# Altium PCB mainboard.PcbDoc (part 1 of 2)
Units mil, origin at the board's own origin, x right, y up, seen from the top; angles counter-clockwise.
Board outline 2559.06 x 3545 mil, 4 copper layers (SIG1, GND, PWR, SIG2), stack 61.811 mil thick; 133 components, 106 nets, 436 pads, 349 vias.
Unrouted connection lines stored in the file: 120.
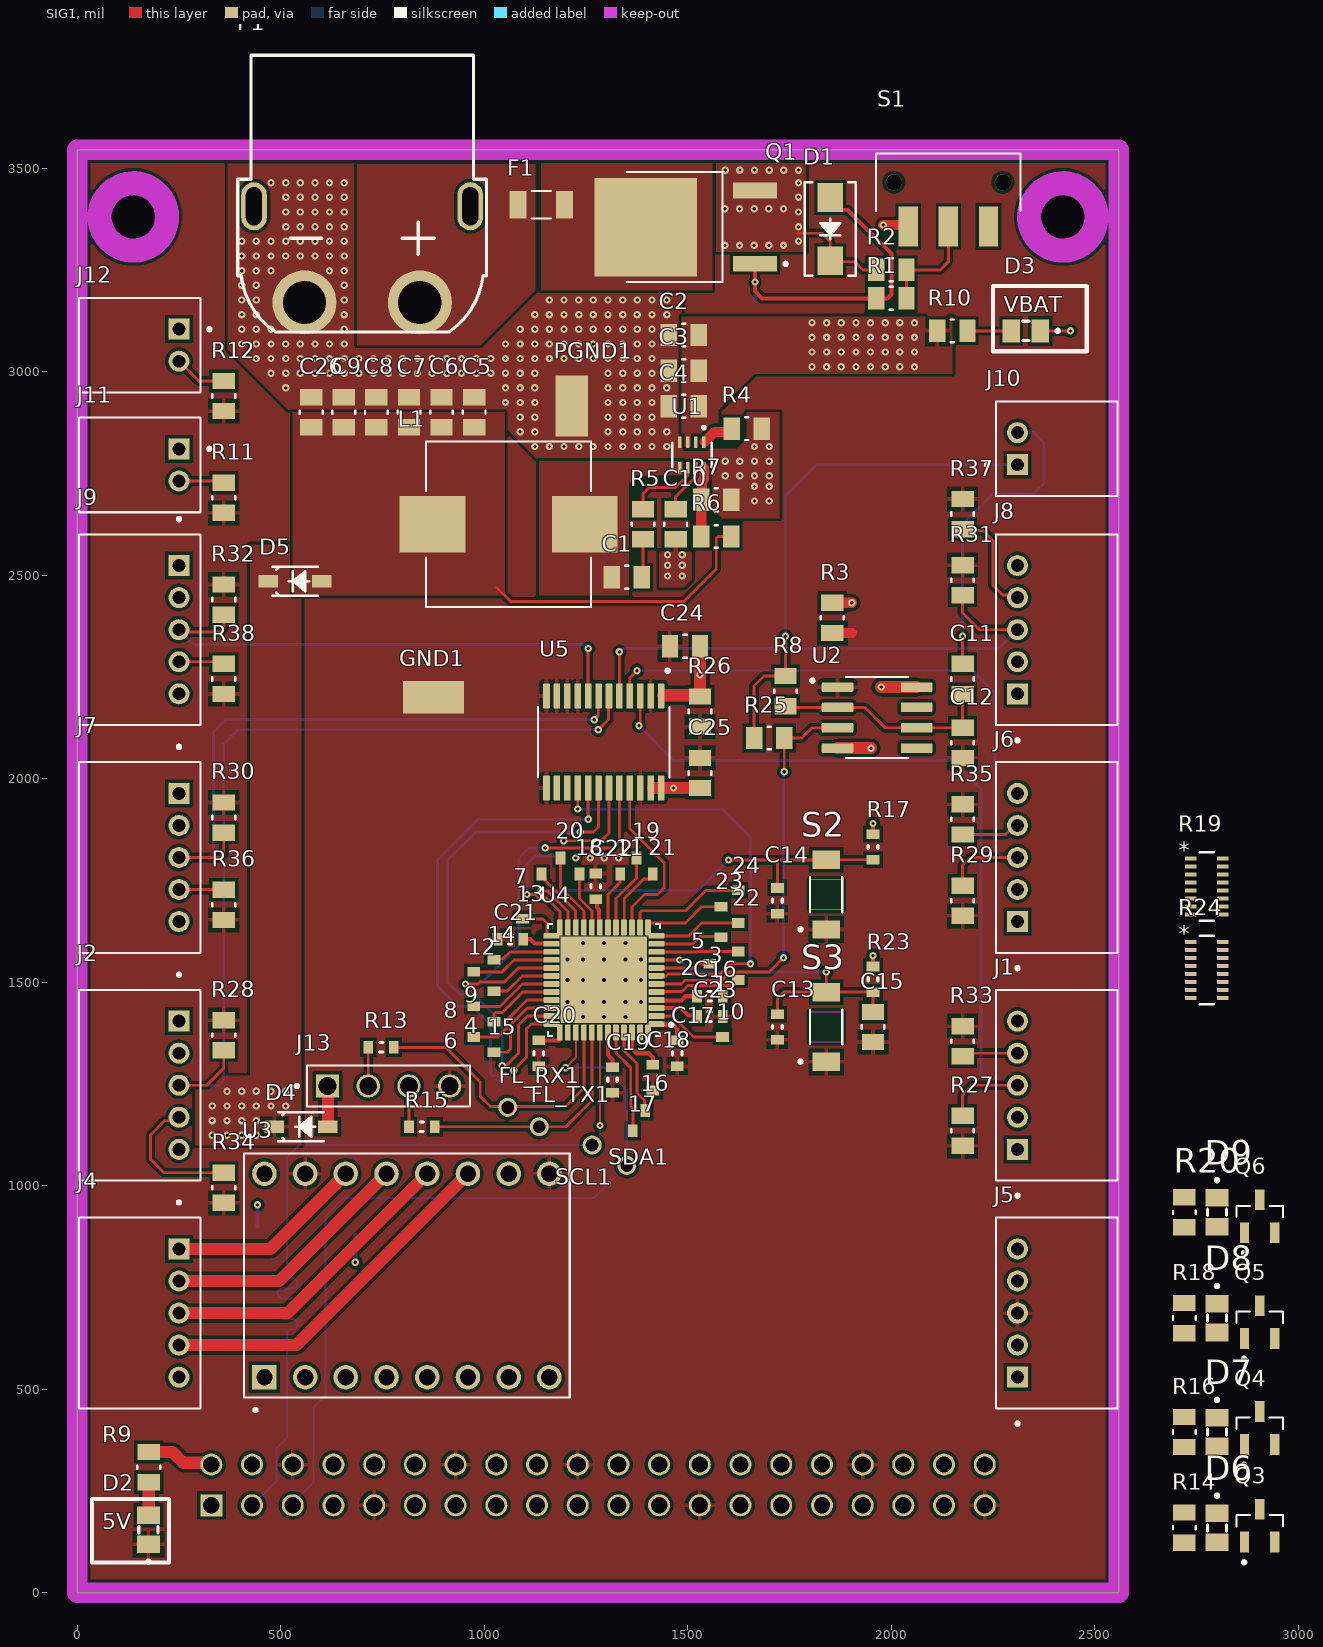
[diagram p0: SIG1 view]
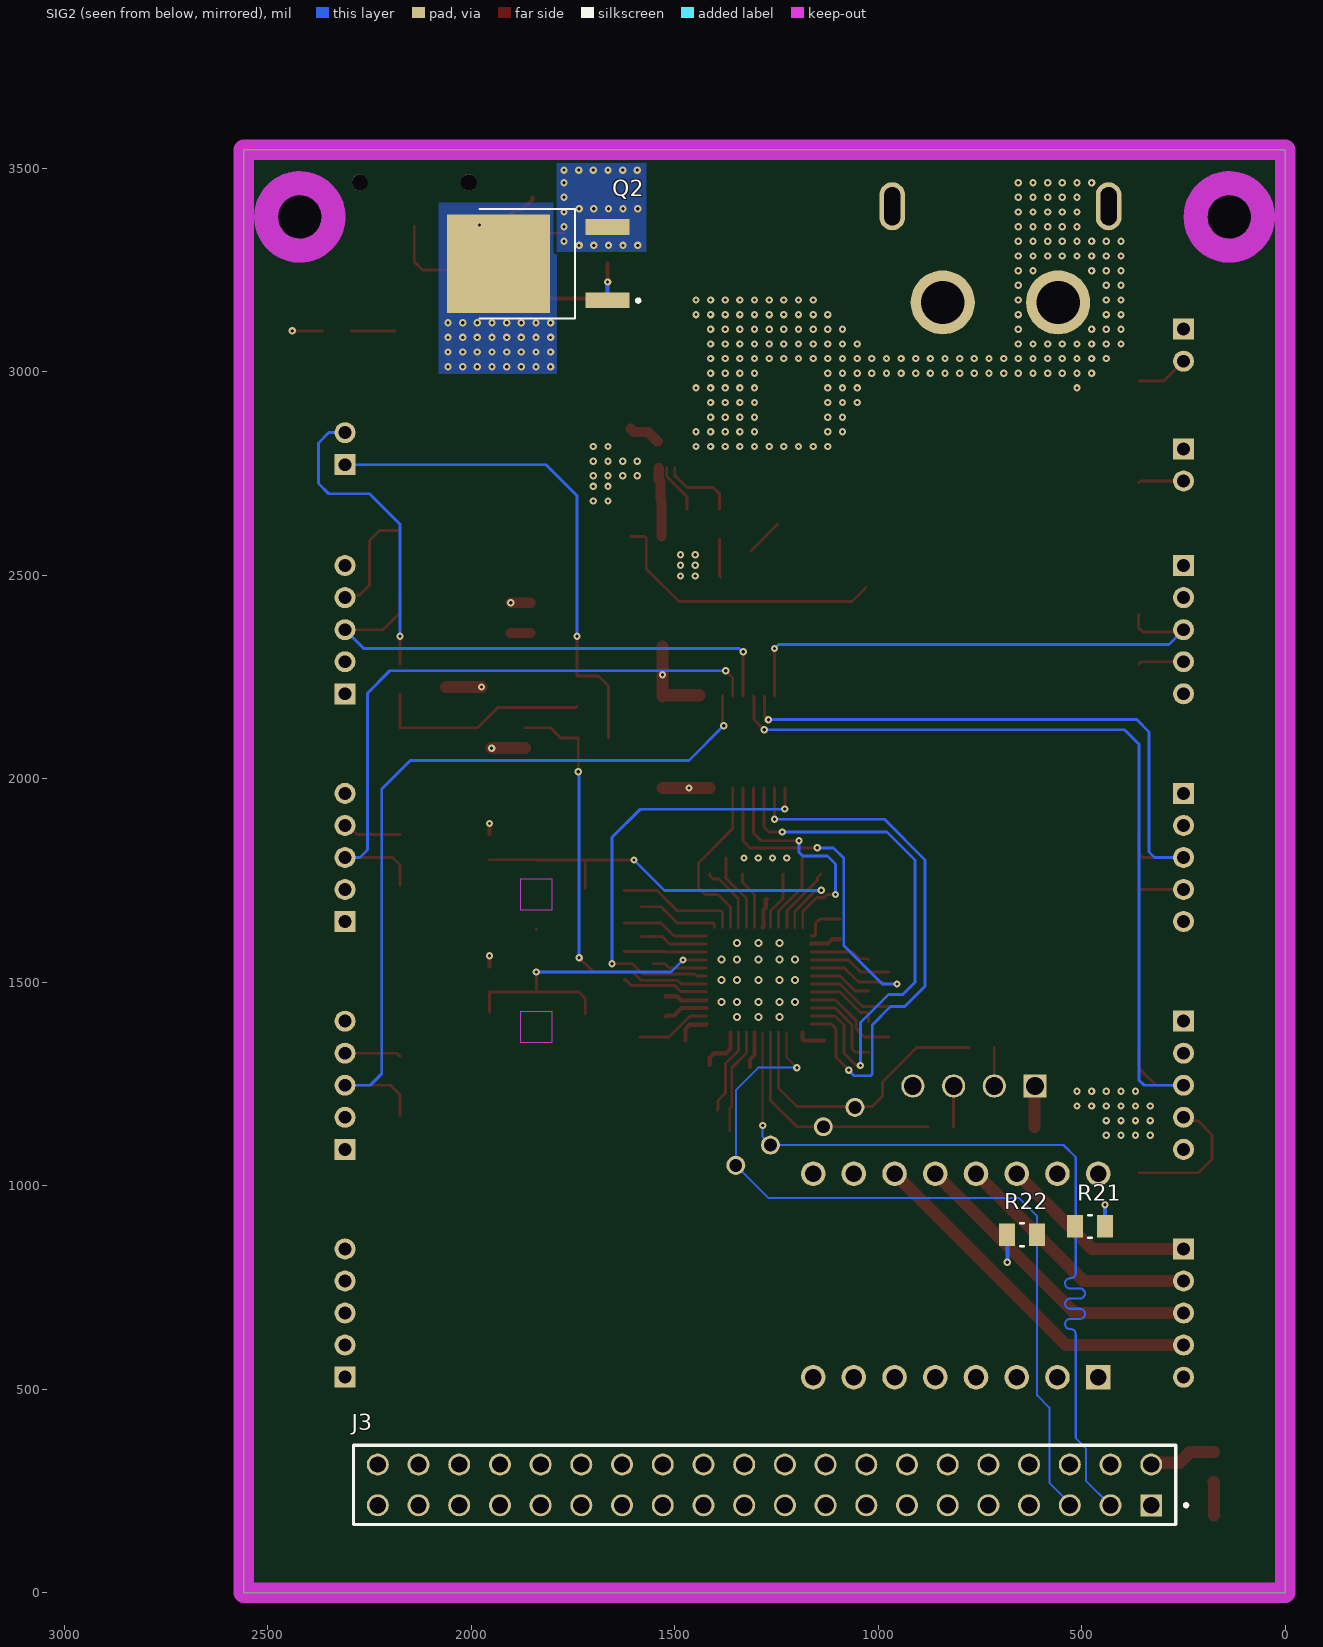
[diagram p1: SIG2 view, seen from below]
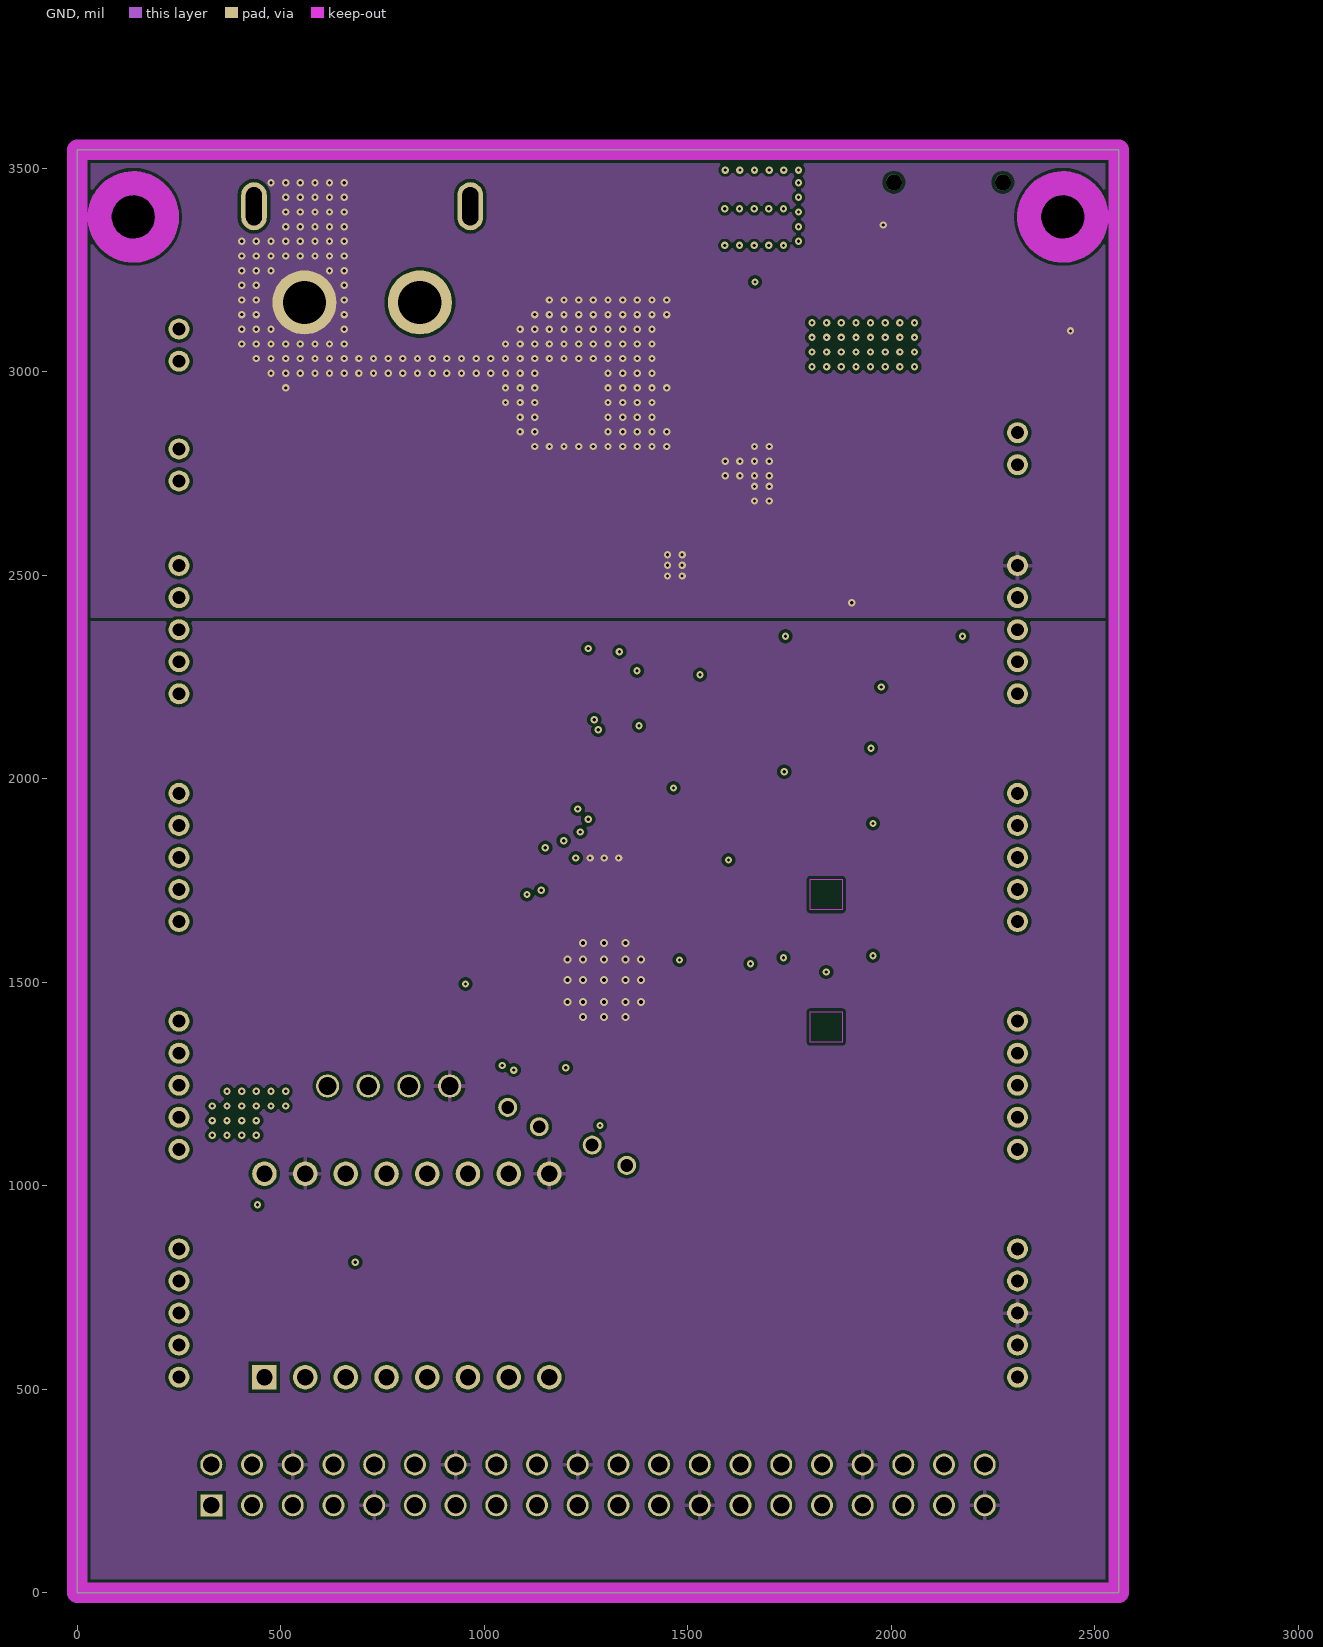
[diagram p2: GND]
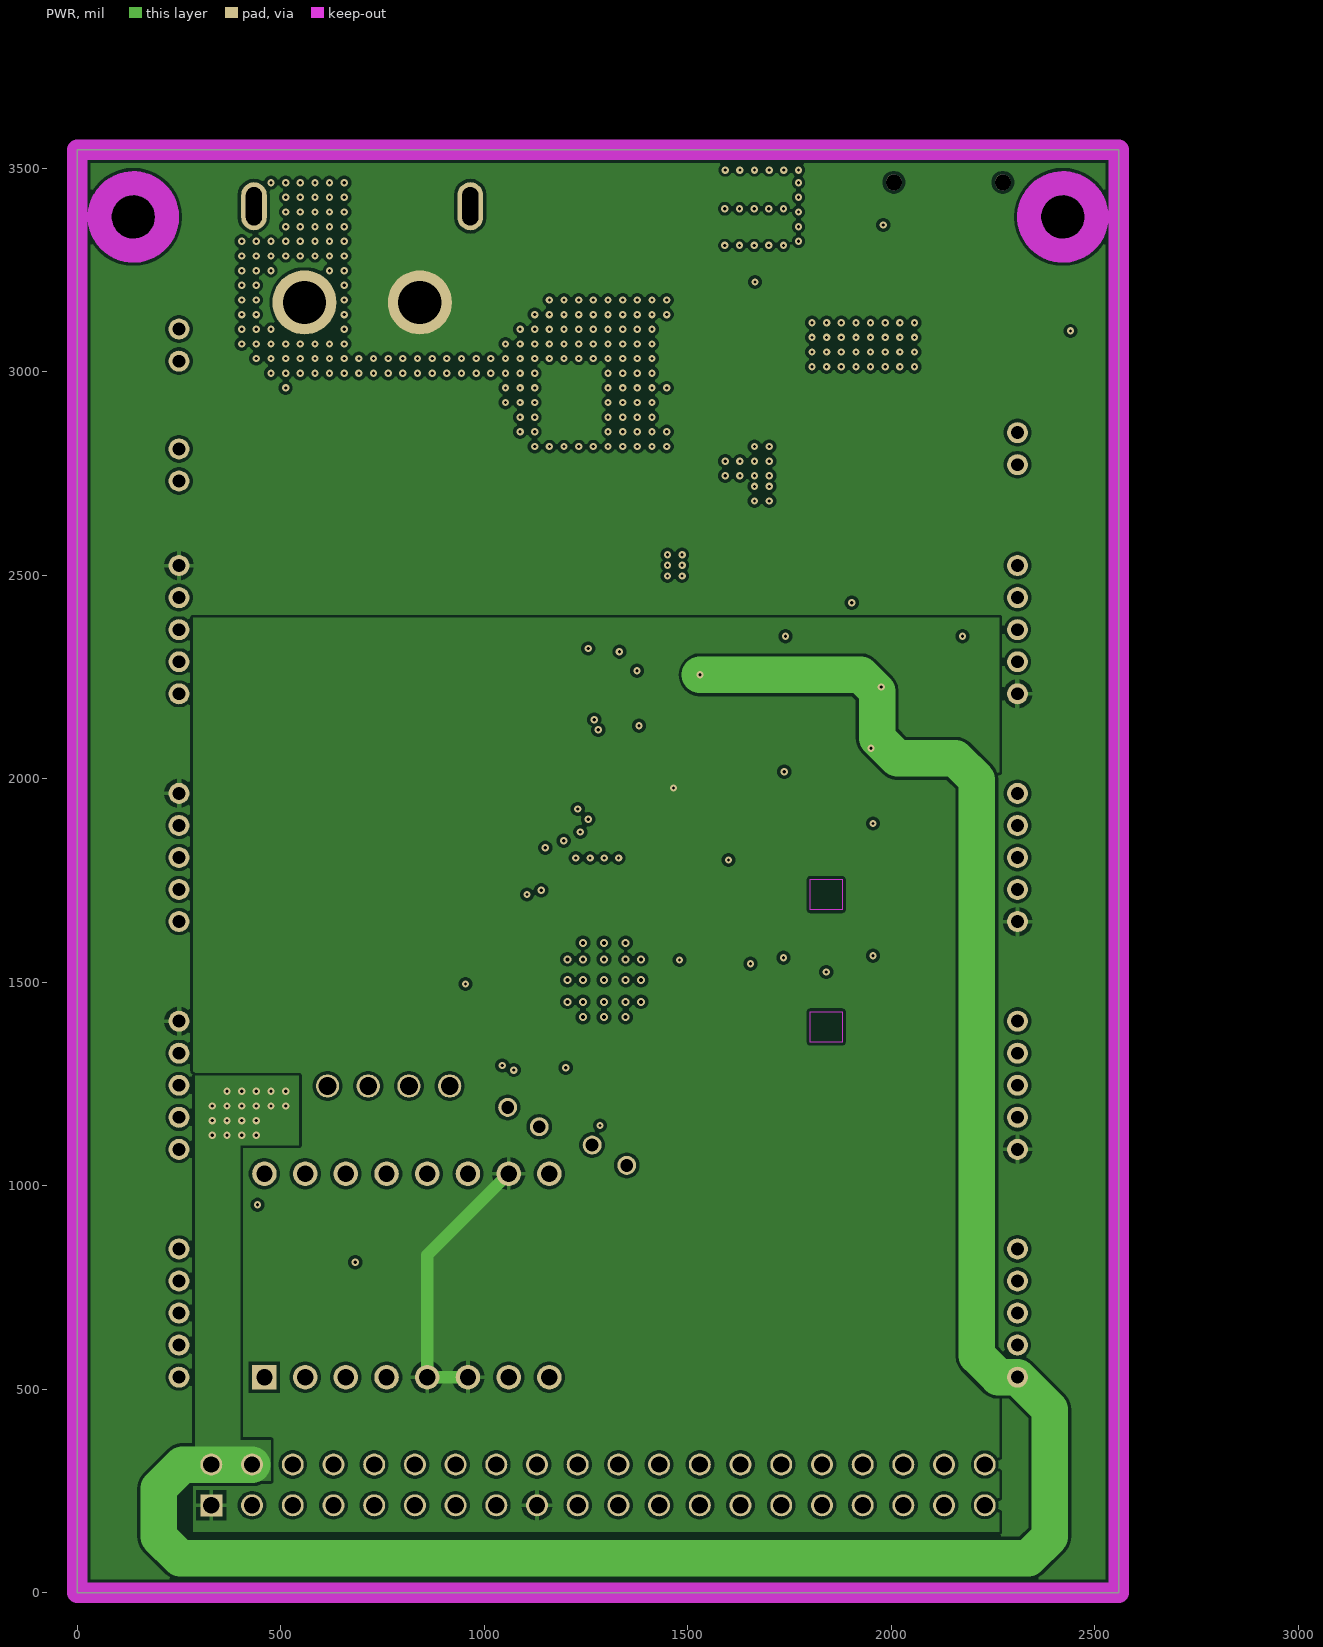
[diagram p3: PWR]

## Layer stack, top to bottom
Top Mask: solder mask 0.5906, Solder Resist, Dk 3.8
SIG1: signal copper 1.378
Dielectric 1: prepreg 3.937, 2313, Dk 4.05
GND: signal copper 0.689
Core: core 49.8031, FR-4, Dk 4.5
PWR: signal copper 0.689
Dielectric 2: prepreg 3.937, 2313, Dk 4.05
SIG2: signal copper 1.378
Bottom Mask: solder mask 0.5906, Solder Resist, Dk 3.8

## Board outline
0,0 0,3545 2559.05,3545 2559.06,0

## Design rules (kind name [scope] priority, off if disabled: settings)
BoardOutlineClearance [All] p1: gap=7.87 ignorepadtopadclearanceinfootprint=FALSE except(15.75: Arc-SplitBarrior Arc-SplitContinuation Track-SplitBarrior Track-SplitContinuation SMDPad-SplitBarrior SMDPad-SplitContinuation THPad-SplitBarrior THPad-SplitContinuation Via-SplitBarrior Via-SplitContinuation Fill-SplitBarrior Fill-SplitContinuation Poly-SplitBarrior Poly-SplitContinuation Region-SplitBarrior Region-SplitContinuation Text-SplitBarrior Text-SplitContinuation)
Clearance "Clearance Bottom Layer" [OnLayer('Bottom Layer')] p1: gap=8 ignorepadtopadclearanceinfootprint=TRUE except(10: Arc-Text Track-Text SMDPad-Text THPad-Text Via-Text Fill-Text Poly-Text Region-Text Text-Text)
Clearance "Clearance Top Layer" [OnLayer('Top Layer')] p2: gap=8 ignorepadtopadclearanceinfootprint=TRUE except(10: Arc-Text Track-Text SMDPad-Text THPad-Text Via-Text Fill-Text Poly-Text Region-Text Text-Text)
Clearance [All] p3: gap=7.87 ignorepadtopadclearanceinfootprint=FALSE except(3.5: Arc-Arc Arc-Track Arc-SMDPad Track-Track Track-SMDPad SMDPad-SMDPad; 5: Arc-Via Track-Via SMDPad-Via THPad-Via Via-Via; 10: Arc-Text Track-Text SMDPad-Text THPad-Text Via-Text Fill-Text Poly-Text Region-Text Text-Text)
HoleSize [All] p1: absolutevalues=TRUE maxlimit=248.03 minlimit=7.87 maxpercent=80.000 minpercent=20.000
MinimumAnnularRing [All] p1: minimumring=3
MinimumSolderMaskSliver [All] p1: minsoldermaskwidth=3.94
PolygonConnect PolygonConnect_Vias [IsVia] p1: connectstyle=Direct reliefconductorwidth=10 reliefentries=4 polygonreliefangle="90 Angle" airgapwidth=10
PolygonConnect [All] p2: connectstyle=Relief reliefconductorwidth=10 reliefentries=4 polygonreliefangle="90 Angle" airgapwidth=10
RoomDefinition "ESP32 Microcontroller" [InComponentClass('ESP32 Microcontroller')] p1: confinementstyle=ConfineIn formatcopy=TRUE lockcomponents=FALSE outline -1000,-950 955,-950 955,-318.5 -1000,-318.5
RoomDefinition "Raspberry Pi, BLDC, Stepper, and Coil Connectors" [InComponentClass('Raspberry Pi, BLDC, Stepper, and Coil Connectors')] p2: confinementstyle=ConfineIn formatcopy=TRUE lockcomponents=FALSE outline -1000,-1000 1000,-1000 1000,0 -1000,0
RoomDefinition "Power Input & Regulation" [InComponentClass('Power Input & Regulation')] p3: confinementstyle=ConfineIn formatcopy=TRUE lockcomponents=FALSE outline -1000,-1000 1000,-1000 1000,0 -1000,0
RoomDefinition "555 Metal Detector Circuit" [InComponentClass('555 Metal Detector Circuit')] p4: confinementstyle=ConfineIn formatcopy=TRUE lockcomponents=FALSE outline -1000,-1000 1000,-1000 1000,0 -1000,0
RoutingCorners [All] p1: cornerstyle=Round minsetback=100 maxsetback=100
RoutingVias [All] p1: holewidth=19.68 width=39.37 viastyle="Through Hole" minholewidth=7.87 minwidth=17.72 maxholewidth=39.37 maxwidth=78.74
SilkToSilkClearance [All] p1: silktosilkclearance=3.94
SilkToSolderMaskClearance [IsPad] p1: minsilkscreentomaskgap=3.94 clearancetoexposedcopper=TRUE
SolderMaskExpansion SolderMaskExpansion_Via [IsVia] p1: expansion=4 istentingtop=TRUE
SolderMaskExpansion [All] p2: expansion=4 istentingtop=FALSE
Width [All] p1: maxlimit=100 minlimit=3.5 preferedwidth=7
25 further rules are at their usual default settings.

## Classes and differential pairs
component class "ESP32 Microcontroller": 1 2 3 4 5 6 7 8 9 10 11 12 13 14 15 16 17 18 19 20 21 22 23 24 BOOT1 C13 C14 C15 C16 C17 C18 C19 C20 C21 C22 C23 FL_RX1 FL_TX1 J13 R13 R15 R17 R21 R22 R23 RESET1 S2 S3 SCL1 SDA1 U4
component class "Raspberry Pi, BLDC, Stepper, and Coil Connectors": C24 C25 D6 D7 D8 D9 J1 J2 J3 J4 J5 J6 J7 J8 J9 J10 J11 J12 Q3 Q4 Q5 Q6 R11 R12 R14 R16 R18 R19 R20 R24 R26 R27 R28 R29 R30 R31 R32 R33 R34 R35 R36 R37 R38 U3 U5
component class "555 Metal Detector Circuit": C11 C12 R8 R25 U2
component class "Power Input & Regulation": C1 C2 C3 C4 C5 C6 C7 C8 C9 C10 C26 D1 D2 D3 D4 D5 F1 GND1 L1 P1 PGND1 Q1 Q2 R1 R2 R3 R4 R5 R6 R7 R9 R10 S1 U1

## Components (designator, comment, footprint, x,y, rotation, side; value= is the part's Value field where it differs from the comment)
1 "Breakout Pin 0603" "BreakoutPin 0603" 1624.01,1505.47 r90 top
2 "Breakout Pin 0603" "BreakoutPin 0603" 1554.01,1545.47 r90 top
3 "Breakout Pin 0603" "BreakoutPin 0603" 1624.01,1575.47 r270 top
4 "Breakout Pin 0603" "BreakoutPin 0603" 1024.01,1402.97 r270 top
5 "Breakout Pin 0603" "BreakoutPin 0603" 1581.57,1610.47 r90 top
6 "Breakout Pin 0603" "BreakoutPin 0603" 974.01,1365.47 r90 top
7 "Breakout Pin 0603" "BreakoutPin 0603" 1140.67,1765.47 r0 top
8 "Breakout Pin 0603" "BreakoutPin 0603" 974.01,1440.47 r90 top
9 "Breakout Pin 0603" "BreakoutPin 0603" 1024.01,1477.97 r90 top
10 "Breakout Pin 0603" "BreakoutPin 0603" 1585.5,1365.47 r270 top
11 "Breakout Pin 0603" "BreakoutPin 0603" 1334.01,1765.47 r0 top
12 "Breakout Pin 0603" "BreakoutPin 0603" 974.01,1525.47 r270 top
13 "Breakout Pin 0603" "BreakoutPin 0603" 1094.01,1655.47 r270 top
14 "Breakout Pin 0603" "BreakoutPin 0603" 1024.01,1555.47 r270 top
15 "Breakout Pin 0603" "BreakoutPin 0603" 1024.01,1327.97 r270 top
16 "Breakout Pin 0603" "BreakoutPin 0603" 1395,1185 r180 top
17 "Breakout Pin 0603" "BreakoutPin 0603" 1365,1135 r180 top
18 "Breakout Pin 0603" "BreakoutPin 0603" 1234.01,1765.47 r0 top
19 "Breakout Pin 0603" "BreakoutPin 0603" 1374.01,1805.47 r0 top
20 "Breakout Pin 0603" "BreakoutPin 0603" 1187.34,1805.47 r0 top
21 "Breakout Pin 0603" "BreakoutPin 0603" 1414.01,1765.47 r180 top
22 "Breakout Pin 0603" "BreakoutPin 0603" 1624.01,1645.47 r90 top
23 "Breakout Pin 0603" "BreakoutPin 0603" 1581.57,1685.47 r270 top
24 "Breakout Pin 0603" "BreakoutPin 0603" 1624.01,1725.47 r270 top
C1 "0.1uF 50V" 0805 1350,2495 r0 top value=10uF
C2 "10uF 50V" 0805 1490,3090 r0 top value=10uF
C3 "10uF 50V" 0805 1490,3002.5 r0 top value=10uF
C4 "0.1uF 50V" 0805 1490,2915 r0 top value=10uF
C5 "22uF" 0805 975,2900 r270 top
C6 "22uF" 0805 895,2900 r270 top
C7 "22uF" 0805 815,2900 r270 top
C8 "0.1uF 50V" 0805 735,2900 r270 top value=10uF
C9 "0.1uF 50V" 0805 655,2900 r270 top value=10uF
C10 "33nF 50V" 0805 1470,2625 r90 top value=33nF
C11 "2.2uF" 0805 2175,2245 r90 top
C12 "2.2uF" 0805 2175,2088 r90 top
C13 "0.10uF" 0603 1720,1390 r90 top
C14 "0.10uF" 0603 1720,1700 r90 top
C15 "0.10uF" 0805 1955,1390 r90 top
C16 "4.7uF" 0603 1554.01,1465.47 r180 top
C17 "1.0uF" 0603 1474.01,1325.47 r90 top
C18 "1.0uF" 0603 1414.01,1265.47 r90 top
C19 "1.0uF" 0603 1315,1260 r90 top
C20 "1.0uF" 0603 1134.01,1325.47 r90 top
C21 "1.0uF" 0603 1064.01,1605.47 r0 top
C22 "1.0uF" 0603 1274.01,1735.47 r270 top
C23 "1.0uF" 0603 1554.01,1415.47 r180 top
C24 "0.10uF" 0805 1493,2325 r0 top
C25 "0.10uF" 0805 1530,2014.01 r270 top
C26 "22uF" 0805 575,2900 r270 top
D1 "SMAZ12-13-F" SMA_DIO-L 1850,3350 r90 top
D2 "SML-LXT0805IW-TR" LEDC2012X120N 175,155 r90 top
D3 "SML-LXT0805GW-TR" LEDC2012X120N 2330,3100 r180 top
D4 "SM5817PL-TP" SOD-123 550,1145 r0 top
D5 "SM5817PL-TP" SOD-123 535,2485 r0 top
D6 "SML-LXT0805IW-TR" LEDC2012X120N 2800,160 r270 top
D7 "SML-LXT0805IW-TR" LEDC2012X120N 2800,395 r270 top
D8 "SML-LXT0805IW-TR" LEDC2012X120N 2800,675 r270 top
D9 "SML-LXT0805IW-TR" LEDC2012X120N 2800,935 r270 top
F1 "Fuse 10A 1206" 1206 1140,3410 r0 top
FL_RX1 "Test Point (Via)" TP 1057.5,1192.5 r180 top
FL_TX1 "Test Point (Via)" TP 1135,1145 r180 top
GND1 "Test Point - 5019" TP380X203 875,2200 r180 top
J1 "S5B-PH-K-S(LF)(SN)" JST_S5B-PH-K-S(LF)(SN) 2310,1246.8 r90 top
J2 "S5B-PH-K-S(LF)(SN)" JST_S5B-PH-K-S(LF)(SN) 250,1246.8 r270 top
J3 "CN HDR 40POS" "CN HDR 40POS 0.1 TH" 1279.53,265 r180 bottom
J4 "S5B-PH-K-S(LF)(SN)" JST_S5B-PH-K-S(LF)(SN) 250,687.22 r270 top
J5 "S5B-PH-K-S(LF)(SN)" JST_S5B-PH-K-S(LF)(SN) 2310,687.22 r90 top
J6 "S5B-PH-K-S(LF)(SN)" JST_S5B-PH-K-S(LF)(SN) 2310,1806.38 r90 top
J7 "S5B-PH-K-S(LF)(SN)" JST_S5B-PH-K-S(LF)(SN) 250,1806.38 r270 top
J8 "S5B-PH-K-S(LF)(SN)" JST_S5B-PH-K-S(LF)(SN) 2310,2365.96 r90 top
J9 "S5B-PH-K-S(LF)(SN)" JST_S5B-PH-K-S(LF)(SN) 250,2365.96 r270 top
J10 "S2B-PH-K-S(LF)(SN)" JST_S2B-PH-K-S(LF)(SN) 2310,2810.63 r90 top
J11 "S2B-PH-K-S(LF)(SN)" JST_S2B-PH-K-S(LF)(SN) 250,2770.63 r270 top
J12 "S2B-PH-K-S(LF)(SN)" JST_S2B-PH-K-S(LF)(SN) 250,3065 r270 top
J13 "61300411121" WURTH_61300411121 765,1245 r0 top
L1 "PA4342.682NLT" IND_PA4342.332NLT 1060,2625 r180 top
P1 "XT60" Amass_XT60PW-M 700,3170 r0 top value=N/A
PGND1 "Test Point - 5019" TP380X203 1215,2915 r90 top
Q1 "IPD85P04P4-07" "DPAK (TO-252)" 1500,3355 r90 top
Q2 "IPD85P04P4-07" "DPAK (TO-252)" 1830,3265 r90 bottom
Q3 "T2N7002BK,LM" SOT95P237X112-3N 2905,165 r90 top
Q4 "T2N7002BK,LM" SOT95P237X112-3N 2905,405 r90 top
Q5 "T2N7002BK,LM" SOT95P237X112-3N 2905,665 r90 top
Q6 "T2N7002BK,LM" SOT95P237X112-3N 2905,925 r90 top
R1 "100k" 0805 2000,3180 r180 top
R2 "100k" 0805 2000,3250 r180 top
R3 "0" 0805 1855,2395 r270 top
R4 "0" 0805 1645,2860 r0 top
R5 "0" 0805 1390,2625 r90 top
R6 "53.6k" 0805 1570,2595 r0 top value=1
R7 "10.2k" 0805 1570,2685 r180 top
R8 "47k" 0805 1740,2215 r270 top
R9 "150" 0805 176.04,308.78 r90 top value=1
R10 "1k" 0805 2150,3100 r180 top value=1
R11 "10k" 0805 360,2690 r90 top
R12 "10k" 0805 360,2940 r90 top
R13 "1k" 0603 746.5,1340 r0 top
R14 "150" 0805 2720,160 r270 top
R15 "1k" 0603 846.5,1145 r0 top
R16 "150" 0805 2720,394.91 r270 top
R17 "10k" 0603 1955,1832.13 r90 top
R18 "150" 0805 2720,674.91 r270 top
R19 "YC248-JR-070RL" RES_YC248_4X1P6_YAG-M 2775,1735 r0 top
R20 "150" 0805 2720,934.91 r270 top
R21 "4.7k" 0805 480,900 r180 bottom
R22 "4.7k" 0805 647,879.74 r0 bottom
R23 "10k" 0603 1955,1507.13 r90 top
R24 "YC248-JR-070RL" RES_YC248_4X1P6_YAG-M 2775,1530 r0 top
R25 "0" 0805 1700,2100 r180 top
R26 "10k" 0805 1530,2165 r270 top
R27 "10k" 0805 2175,1135 r270 top
R28 "10k" 0805 360,1369.76 r90 top
R29 "10k" 0805 2175,1700 r270 top
R30 "10k" 0805 360,1904.46 r90 top
R31 "10k" 0805 2175,2487.5 r90 top
R32 "10k" 0805 360,2440 r90 top
R33 "10k" 0805 2175,1355 r90 top
R34 "10k" 0805 360,995 r270 top
R35 "10k" 0805 2175,1900 r90 top
R36 "10k" 0805 360,1690 r270 top
R37 "10k" 0805 2175,2650 r90 top
R38 "10k" 0805 360,2245 r270 top
S1 "SW SLIDE SMALL" "SW SLIDE SMALL" 2140,3465 r180 top locked
S2 "GT-TC029B-H025-L1N" SW_EVP-AWCD4A 1840,1715 r90 top
S3 "GT-TC029B-H025-L1N" SW_EVP-AWCD4A 1840,1390 r90 top
SCL1 "I2C_SCL" TP 1350,1050 r90 top
SDA1 "I2C_SDA" TP 1265,1100 r90 top
U1 "TPS62933DRLR" SOT5X3-8_DRL_TEX 1510,2795 r270 top
U2 "NE555DR" SOIC127P599X175-8N 1965,2150 r0 top
U3 "A4988_STEPPER_MOTOR_DRIVER_CARRIER" MODULE_A4988_STEPPER_MOTOR_DRIVER_CARRIER 810,779.74 r90 top
U4 "ESP32-PICO-D4" "PQFN50P700X700X104-49N - BigPads" 1294.01,1505.47 r180 top
U5 "SN74LVC4245APWR" SOP65P640X120-24N 1293.58,2090 r270 top

## Footprints (in the part's own frame and the unit in brackets; to place one, negate y for a bottom-side part, rotate by r counter-clockwise, add the part's x,y. Pads: shape width x height; smd on the part's side, far side on the other; paste and mask are expansions set on the pad)
0603 [mm] "Chip Resistor, 2-Leads, Body 1.60x0.80mm, IPC High Density"
  rect 0.6x0.8 smd mask+0.1: 1(-0.8,0) 2(0.8,0)
  silkscreen extent -0.1,-0.3 0.1,0.3, body extent -0.8,-0.4 0.8,0.4, height 0.6
0805 [mil]
  rect 40x55 smd: 1(-37,0) 2(37,0)
  silkscreen extent -4,-28 4,28, body extent -47,-28 47,28, height 24
1206 [mm]
  rect 1.05x1.72 smd: 1(-1.46,0) 2(1.46,0)
  silkscreen extent -0.62,-0.85 0.62,0.85, body extent -1.6,-0.8 1.6,0.8, height 1.61
Amass_XT60PW-M [mm] "Right angle XT60 Male Socket"
  round 4 hole 2.7: 1(-3.6,0) 2(3.6,0)
  rrect100% 1.6x3 hole 1 slot 2.4 at 90 deg: Un1(6.75,6) Un2(-6.75,6)
  silkscreen extent -7.76,-1.85 7.76,15.42, body extent -7.95,-1.95 7.95,16.3, height 8.4
"BreakoutPin 0603" [mm] "Exposed 0603 pad for IC breakouts"
  rect 0.6x0.8 smd mask+0.1: 1(0,0)
"CN HDR 40POS 0.1 TH" [mm] "40 Position Header Connector 0.100\" (2.54mm) Through Hole"
  rect 1.37x1.37 hole 1.02: 01(24.13,-1.27)
  round 1.37 hole 1.02: 02(24.13,1.27) 03(21.59,-1.27) 04(21.59,1.27) 05(19.05,-1.27) 06(19.05,1.27) 07(16.51,-1.27) 08(16.51,1.27) 09(13.97,-1.27) 10(13.97,1.27) 11(11.43,-1.27) 12(11.43,1.27) 13(8.89,-1.27) 14(8.89,1.27) 15(6.35,-1.27) 16(6.35,1.27) 17(3.81,-1.27) 18(3.81,1.27) 19(1.27,-1.27) 20(1.27,1.27) 21(-1.27,-1.27) 22(-1.27,1.27) 23(-3.81,-1.27) 24(-3.81,1.27) 25(-6.35,-1.27) 26(-6.35,1.27) 27(-8.89,-1.27) 28(-8.89,1.27) 29(-11.43,-1.27) 30(-11.43,1.27) 31(-13.97,-1.27) 32(-13.97,1.27) 33(-16.51,-1.27) 34(-16.51,1.27) 35(-19.05,-1.27) 36(-19.05,1.27) 37(-21.59,-1.27) 38(-21.59,1.27) 39(-24.13,-1.27) 40(-24.13,1.27)
  silkscreen extent -25.66,-2.47 26.4,2.47, body extent -25.65,-2.54 25.65,2.54, height 8.51
"DPAK (TO-252)" [mil]
  rect 38.58x107.87 smd: 1(-90,-165) 3(90,-165)
  rect 241.67x251.97 smd paste-157.48: 2(0,103)
  silkscreen extent -135,-244 135,150, body extent -128,-185 128,205, height 97
IND_PA4342.332NLT [mm]
  rect 4.1x3.5 smd mask+0.05: 1(-4.75,0) 2(4.75,0)
  silkscreen extent -5.15,-5.15 5.15,5.15, body extent -5.75,-5.15 5.75,5.15, height 4
JST_S2B-PH-K-S(LF)(SN) [mm]
  rect 1.308x1.308 / inner round 1.308 / far side rect 1.308x1.308 hole 0.8: 1(-1,0)
  round 1.308 hole 0.8: 2(1,0)
  silkscreen extent -2.95,-6.25 2.95,2, body extent -2.95,-6.2 2.95,1.4, height 4.8
JST_S5B-PH-K-S(LF)(SN) [mm]
  rect 1.308x1.308 / inner round 1.308 / far side rect 1.308x1.308 hole 0.8: 1(-4,0)
  round 1.308 hole 0.8: 2(-2,0) 3(0,0) 4(2,0) 5(4,0)
  silkscreen extent -7,-6.25 5.95,1.35, body extent -5.95,-6.22 5.95,1.38, height 4.8
LEDC2012X120N [mm]
  rect 1.1x1.45 smd: A(0.9,0) C(-0.9,0)
  silkscreen extent -2.1,-0.6 0.2,0.6, body extent -1,-0.65 1,0.65, height 0.9
MODULE_A4988_STEPPER_MOTOR_DRIVER_CARRIER [mm]
  rect 1.53x1.53 hole 1.02: 1(-6.35,8.89)
  round 1.53 hole 1.02: 2(-6.35,6.35) 3(-6.35,3.81) 4(-6.35,1.27) 5(-6.35,-1.27) 6(-6.35,-3.81) 7(-6.35,-6.35) 8(-6.35,-8.89) 9(6.35,-8.89) 10(6.35,-6.35) 11(6.35,-3.81) 12(6.35,-1.27) 13(6.35,1.27) 14(6.35,3.81) 15(6.35,6.35) 16(6.35,8.89)
  silkscreen extent -8.5,-10.16 7.62,10.16
"PQFN50P700X700X104-49N - BigPads" [mm]
  rrect25% 1x0.35 smd: 1(-3.265,2.75) 2(-3.265,2.25) 3(-3.265,1.75) 4(-3.265,1.25) 5(-3.265,0.75) 6(-3.265,0.25) 7(-3.265,-0.25) 8(-3.265,-0.75) 9(-3.265,-1.25) 10(-3.265,-1.75) 11(-3.265,-2.25) 12(-3.265,-2.75) 25(3.265,-2.75) 26(3.265,-2.25) 27(3.265,-1.75) 28(3.265,-1.25) 29(3.265,-0.75) 30(3.265,-0.25) 31(3.265,0.25) 32(3.265,0.75) 33(3.265,1.25) 34(3.265,1.75) 35(3.265,2.25) 36(3.265,2.75)
  rrect25% 0.35x1 smd: 13(-2.75,-3.265) 14(-2.25,-3.265) 15(-1.75,-3.265) 16(-1.25,-3.265) 17(-0.75,-3.265) 18(-0.25,-3.265) 19(0.25,-3.265) 20(0.75,-3.265) 21(1.25,-3.265) 22(1.75,-3.265) 23(2.25,-3.265) 24(2.75,-3.265) 37(2.75,3.265) 38(2.25,3.265) 39(1.75,3.265) 40(1.25,3.265) 41(0.75,3.265) 42(0.25,3.265) 43(-0.25,3.265) 44(-0.75,3.265) 45(-1.25,3.265) 46(-1.75,3.265) 47(-2.25,3.265) 48(-2.75,3.265)
  rect 5.4x5.4 smd paste-4: 49(0,0)
  silkscreen extent -4.3,-3.5 3.5,3.5, body extent -3.5,-3.5 3.5,3.5, height 1.04
RES_YC248_4X1P6_YAG-M [mil]
  rect 28x10 smd paste+0 mask+0: 1(-39.5,68.9) 2(-39.5,49.21) 3(-39.5,29.53) 4(-39.5,9.84) 5(-39.5,-9.84) 6(-39.5,-29.53) 7(-39.5,-49.21) 8(-39.5,-68.9) 9(39.5,-68.9) 10(39.5,-49.21) 11(39.5,-29.53) 12(39.5,-9.84) 13(39.5,9.84) 14(39.5,29.53) 15(39.5,49.21) 16(39.5,68.9)
  silkscreen extent -17,-84 17,84, body extent -31,-79 31,79, height 22
SMA_DIO-L [mil]
  rect 70.84x62.17 smd paste+0 mask+0: 1(-77.62,0) 2(77.62,0)
  silkscreen extent -115,-62 115,62, body extent -110,-57 110,57, height 93
SOD-123 [mil]
  rect 48x30 smd: A(66,0) C(-66,0)
  silkscreen extent -56,-36 56,36
SOIC127P599X175-8N [mm]
  rrect25% 1.97x0.6 smd: 1(-2.47,1.905) 2(-2.47,0.635) 3(-2.47,-0.635) 4(-2.47,-1.905) 5(2.47,-1.905) 6(2.47,-0.635) 7(2.47,0.635) 8(2.47,1.905)
  silkscreen extent -4.14,-2.52 1.95,2.52
SOP65P640X120-24N [mm]
  rrect25% 1.57x0.41 smd: 1(-2.87,3.575) 2(-2.87,2.925) 3(-2.87,2.275) 4(-2.87,1.625) 5(-2.87,0.975) 6(-2.87,0.325) 7(-2.87,-0.325) 8(-2.87,-0.975) 9(-2.87,-1.625) 10(-2.87,-2.275) 11(-2.87,-2.925) 12(-2.87,-3.575) 13(2.87,-3.575) 14(2.87,-2.925) 15(2.87,-2.275) 16(2.87,-1.625) 17(2.87,-0.975) 18(2.87,-0.325) 19(2.87,0.325) 20(2.87,0.975) 21(2.87,1.625) 22(2.87,2.275) 23(2.87,2.925) 24(2.87,3.575)
  silkscreen extent -4.54,-4.1 2.2,4.1, body extent -3.2,-3.9 3.2,3.9, height 1.2
SOT5X3-8_DRL_TEX [mil]
  rect 28x9 smd paste+0 mask+0: 1(-31.5,29.53) 2(-31.5,9.84) 3(-31.5,-9.84) 4(-31.5,-29.53) 5(31.5,-29.53) 6(31.5,-9.84) 7(31.5,9.84) 8(31.5,29.53)
  silkscreen extent -71,-49 31,49, body extent -34,-44 34,44, height 24
SOT95P237X112-3N [mm]
  rect 1.3x0.59 smd: 1(-1.025,0.95) 2(-1.025,-0.95) 3(1.025,0)
  silkscreen extent -2.39,-1.46 0.65,1.46, body extent -1.54,-1.5 1.29,1.5, height 1.2
"SW SLIDE SMALL" [mm]
  rect 1.2x2.5 smd: 1(-2.5,2.75) 2(0,2.75) 3(2.5,2.75)
  round 1 hole 1 unplated: ""(-3.4,0) ""(3.4,0)
  silkscreen extent -4.5,-1.8 4.5,1.8, body extent -4.5,-3.75 4.5,3.75, height 3.51
SW_EVP-AWCD4A [mm]
  rect 1.15x1.7 smd: 1(-2.175,0) 2(2.175,0)
  Keep-Out Layer region: 0.95,-1 -0.95,-1 -0.95,1 0.95,1
  Keep-Out Layer region: 0.95,-1 -0.95,-1 -0.95,1 0.95,1
  silkscreen extent -2.26,-1 1.1,1.7
TP [mm] "Test point (40mil Standard)"
  round 1.181 hole 0.8: 1(0,0)
TP380X203 [mm]
  rect 3.8x2.03 smd: 1(0,0)
WURTH_61300411121 [mm]
  rect 1.45x1.45 / inner round 1.45 / far side rect 1.45x1.45 hole 1.1 mask+0.05: 01(-3.81,0)
  round 1.45 hole 1.1 mask+0.05: 02(-1.27,0) 03(1.27,0) 04(3.81,0)
  silkscreen extent -5.83,-1.27 5.08,1.27, body extent -5.08,-1.27 5.08,1.27, height 8.54

## Part data
1 2 3 4 5 6 7 8 9 10 11 12 13 14 15 16 17 18 19 20 21 22 23 24: "0603 breakout pad", Part Number="Breakout Pin 0603"
C1 C2 C3 C4 C8 C9: library part "CAP 10uF 50V", "Default Symbol for Capacitors", Manufacturer Part Number 1=GRM21BR61H106KE43L, Manufacturer Part Number 2=CL32B106KBJNNWE, Rating=50V, Supplier Part Number 1=490-18663-1-ND, Temperature Coefficient=X5R, Tolerance=10%, Part Number="CAP 10uF 50V", Supplier 1=Digi-Key, Supplier 2=Digi-Key, Supplier Part Number 2=1276-3388-1-ND
C5 C6 C7 C26: library part "CAP 22uF 16V", "CAP CER 22UF 16V X5R 0805", Operating Temperature="-55°C ~ 85°C", Package=0805, Rating=16V, Temperature Coefficient=X5R, Tolerance=10%, Part Number="CAP 22uF 16V"
C10: library part "CAP 33nF 50V", "Default Symbol for Capacitors", Rating=50V, Tolerance=5%, Part Number="CAP 33nF 50V"
C11 C12: library part "CAP 2.2uF 35V", "CAP CER 2.2UF 35V X7R 0603/0805", Manufacturer Part Number 1=C1608X5R1V225K080AC, Manufacturer Part Number 2=CGA4J1X7R1V225K125AE, Operating Temperature="-55°C ~ 125°C", Package=0603/0805, Rating=35V, Supplier Part Number 1=445-8025-1-ND, Temperature Coefficient=X5R, Tolerance=10%, Part Number="CAP 2.2uF 35V", Supplier 1=Digi-Key, Supplier 2=Digi-Key, Supplier Part Number 2=445-8787-1-ND
C13 C14 C15 C24 C25: library part "CAP 0.1uF 50V", "Default Symbol for Capacitors", Rating=50V, Temperature Coefficient=X7R, Tolerance=10%, Part Number="CAP 0.1uF 50V"
C16: library part "CAP 4.7uF 35V", "CAP CER 4.7UF 35V X7R 0603/0805", Operating Temperature="-55°C ~ 125°C", Package=0603/0805, Rating=35V, Temperature Coefficient=X7R, Tolerance=10%, Part Number="CAP 4.7uF 35V"
C17 C18 C19 C20 C21 C22 C23: library part "CAP 1.0uF 16V", "CAP CER 1.0UF 16V X5R 0603/0805", Operating Temperature="-55°C ~ 85°C", Package=0603/0805, Rating=16V, Temperature Coefficient=X5R, Tolerance=10%, Part Number="CAP 1.0uF 16V"
D1: library part "DIODE ZENER 12V 1W", "Zener Diode 12 V 1 W ±5% Surface Mount SMA", Mfr_Name="Diodes Inc", Supplier Part Number 1=SMAZ12-FDICT-ND, Copyright="Copyright (C) 2021 Ultra Librarian. All rights reserved.", Digi-Key_Part_Number_1=SMAZ12-FDICT-ND, Digi-Key_Part_Number_2=SMAZ12-FDIDKR-ND, Digi-Key_Part_Number_3=SMAZ12-FDITR-ND, Manufacturer Part Number 1=SMAZ12-13-F, Manufacturer_Part_Number=SMAZ12-13-F, Part Number="DIODE ZENER 12V 1W", RefDes=RefDes, Supplier 1=Digi-Key, Supplier 2=Newark, Supplier 3=Digi-Key, Supplier Part Number 2=23T8541, Supplier Part Number 3=SMAZ12-FDICT-ND, Supplier URL 1=https://www.digikey.com/en/products/detail/SMAZ12-13-F/SMAZ12-FDICT-ND/725073?curr=usd&utm_campaign=buynow&utm_medium=aggregator&utm_source=octopart, Type=DEV
D2 D6 D7 D8 D9: "LED;Red;11mcd;0.061In.Dia.;SMD;100mA;2V Vf;635nm;140deg;SMD;White Diffused;5V Vr", Package="0805 Lumex", Check_prices=https://www.snapeda.com/parts/SML-LXT0805IW-TR/Lumex+Opto%252FComponents+Inc./view-part/?ref=eda, MF="Lumex Opto/Components", MP=SML-LXT0805IW-TR, SnapEDA_Link=https://www.snapeda.com/parts/SML-LXT0805IW-TR/Lumex+Opto%252FComponents+Inc./view-part/?ref=snap
D3: "Green LED, 565 nm 0805Diffused, Rectangle Lens SMD package", Package="0805 Lumex", Check_prices=https://www.snapeda.com/parts/SML-LXT0805GW-TR/Lumex+Opto%252FComponents+Inc./view-part/?ref=eda, MF="Lumex Opto/Components", MP=SML-LXT0805GW-TR, SnapEDA_Link=https://www.snapeda.com/parts/SML-LXT0805GW-TR/Lumex+Opto%252FComponents+Inc./view-part/?ref=snap
D4 D5: library part "DIODE SCHOTTKY 20V 1A", "Diode Schottky 20V 1A Surface Mount SOD-123FL", Current Rating=1A, Package=SOD-123, Voltage Rating=20V, ComponentLink1Description=digikey, ComponentLink1URL=https://www.digikey.ca/product-detail/en/on-semiconductor/MBR0540T1G/MBR0540T1GOSCT-ND/917967, Digikey=SM5817PL-TPMSCT-ND, Digikey Link=https://www.digikey.ca/product-detail/en/micro-commercial-co/SM5817PL-TP/SM5817PL-TPMSCT-ND/1793410, MF="Micro Commercial Co", MP=SM5817PL-TP, Part Number="DIODE SCHOTTKY 20V 1A", Pin Count=2, Supplier URL 1=https://www.digikey.ca/product-detail/en/on-semiconductor/MBR0540T1G/MBR0540T1GOSCT-ND/917967
F1: library part "FUSE 10A 63V SLOW", "FUSE 10A 32V AC 63V DC 1206", Operating Temperature="-55°C ~ 90°C", Rating=10A, Voltage Rating - DC=63V, Part Number="FUSE 10A 63V SLOW", Pin Count=2, Response Time="Slow Blow"
GND1 PGND1: "PC Test Point, Miniature Phosphor Bronze, Silver Plating Surface Mount Mounting Type", Package="2010 Keystone", MF="Keystone Electronics", MP=5019, Part Number="Test Point - 5019"
J1 J2 J4 J5 J6 J7 J8 J9: "Connector Header Through Hole, Right Angle 5 position 0.079 (2.00mm)", Package="NON STANDARD-5 J.S.T.", Availability="In Stock", Check_prices=https://www.snapeda.com/parts/S5B-PH-K-S(LF)(SN)/JST+Sales+America+Inc./view-part/?ref=eda, MF="JST Sales America Inc.", MP=S5B-PH-K-S(LF)(SN), Price=None, Purchase-URL=https://pricing.snapeda.com/search/part/S5B-PH-K-S(LF)(SN)/?ref=eda, SnapEDA_Link=https://www.snapeda.com/parts/S5B-PH-K-S(LF)(SN)/JST+Sales+America+Inc./view-part/?ref=snap
J3: "40 Position Header Connector", Supplier Part Number 1=S6104-ND, Part Number="CN HDR 40POS", Pin Count=40, Supplier 1=Digi-Key, Supplier URL 1=https://www.digikey.ca/en/products/detail/sullins-connector-solutions/PPTC202LFBN-RC/807240?s=N4IgTCBcDaIMoDYCMAGALAWgHIBEQF0BfIA
J10 J11 J12: "Connector Header Through Hole, Right Angle 2 position", Package=None, Availability="In Stock", Check_prices=https://www.snapeda.com/parts/S2B-PH-K-S(LF)(SN)/JST+Sales+America+Inc./view-part/?ref=eda, MF="JST Sales America Inc.", MP=S2B-PH-K-S(LF)(SN), Price=None, Purchase-URL=https://pricing.snapeda.com/search/part/S2B-PH-K-S(LF)(SN)/?ref=eda, SnapEDA_Link=https://www.snapeda.com/parts/S2B-PH-K-S(LF)(SN)/JST+Sales+America+Inc./view-part/?ref=snap
J13: "Connector Header Through Hole 4 position 0.100 (2.54mm)", Package=None, Check_prices=https://www.snapeda.com/parts/61300411121/Wurth+Electronics+Inc./view-part/?ref=eda, MF="Wurth Electronics", MP=61300411121, SnapEDA_Link=https://www.snapeda.com/parts/61300411121/Wurth+Electronics+Inc./view-part/?ref=snap
L1: library part PA4342.332NLT, "FIXED IND 6.8UH 8.5A 23.3MOHM SM", Package="Nonstandard Pulse", Availability="In Stock", Check_prices=https://www.snapeda.com/parts/PA4342.332NLT/Pulse/view-part/?ref=eda, MF=Pulse, MP=PA4342.332NLT, Price=None, Purchase-URL=https://pricing.snapeda.com/search/part/PA4342.332NLT/?ref=eda, SnapEDA_Link=https://www.snapeda.com/parts/PA4342.332NLT/Pulse/view-part/?ref=snap
P1: library part "XT60 Connector", "XT60 CONNECTORS FEMALE PAIR", Supplier Part Number 1=1568-1816-ND, Digikey=1568-1816-ND, Digikey Link=https://www.digikey.ca/product-detail/en/sparkfun-electronics/PRT-10474/1568-1816-ND/8258064, MF="SparkFun Electronics", MP=PRT-10474, Package=XT60, Part Number="XT60 Connector", Pin Count=2, Price="2.13000 CAD", Supplier 1=Digi-Key, Supplier URL 1=https://www.digikey.ca/product-detail/en/sparkfun-electronics/PRT-10474/1568-1816-ND/8258064
Q1 Q2: library part "MOSFET IPD85P04P4-07", "P-Channel 40 V 85A (Tc) 88W (Tc) Surface Mount PG-TO252-3-313", Supplier Part Number 1=448-IPD85P04P407ATMA1CT-ND, Part Number="MOSFET IPD85P04P4-07", Supplier 1=Digi-Key, Supplier 2=Mouser, Supplier 3=Digi-Key, Supplier Part Number 2=726-IPD85P04P4-07, Supplier Part Number 3=448-IPD85P04P407ATMA1CT-ND, Supplier URL 1=https://www.digikey.ca/en/products/detail/infineon-technologies/IPD85P04P407ATMA1/5960266
Q3 Q4 Q5 Q6: "No Description Available", Mfr_Name="Toshiba Electronic Devices & Storage Corp.", RefDes=RefDes, Type=Type
R1 R2: library part "RES 100k 1/8W - 1%", "Default Resistor Symbol", Manufacturer Part Number 1=ERJ-H3GJ104V, Package=0805, Power (Watts)=0.125W, Supplier Part Number 1=10-ERJ-H3GJ104VCT-ND, Tolerance=1%, Part Number="RES 100k 1/8W - 1%", Supplier 1=Digi-Key, Supplier URL 1=https://www.digikey.ca/en/products/detail/panasonic-electronic-components/ERJ-H3GJ104V/13877854?s=N4IgTCBcDaIIwAYC0BRASgKSQCQMwHENEAWANQGEAVJAOQBEQBdAXyA
R3 R4 R5 R25: library part "RES 0 JUMPER 0603", "Default Resistor Symbol", Package=0805, Power (Watts)=0.125W, Tolerance=N/A, Part Number="RES 0 JUMPER 0603"
R6: library part "RES 56.2k 1/10W", "Default Resistor Symbol", Package=0805, Power (Watts)=0.125W, Tolerance=5%, Part Number="RES 56.2k 1/10W"
R7: library part "RES 10.2k 1/8W", "Default Resistor Symbol", Package=0805, Power (Watts)=0.125W, Tolerance=5%, Part Number="RES 10.2k 1/8W"
R8: library part "RES 47k 1/8W - 1%", "RES SMD 47K OHM 1% 1/8W 0603", Manufacturer Part Number 1=MCT06030C4702FP500, Package=0805, Power (Watts)=0.125W, Supplier Part Number 1=MCT0603-47.0K-CFCT-ND, Tolerance=1%, Part Number="RES 47k 1/8W - 1%", Supplier 1=Digi-Key, Supplier URL 1=https://www.digikey.ca/en/products/detail/vishay-beyschlag-draloric-bc-components/MCT06030C4702FP500/2607854?s=N4IgTCBcDaILIGEAqAGAbCgzAWgCwHYA6FAaWwQDFlsA5AERAF0BfIA
R9 R14 R16 R18 R20: library part "RES 150.0 1/8W", "Default Resistor Symbol", Package=0805, Power (Watts)=0.125W, Tolerance=5%, Part Number="RES 150.0 1/8W"
R10: library part "RES 1.1k 1/8W", "Default Resistor Symbol", Package=0805, Power (Watts)=0.125W, Tolerance=5%, Part Number="RES 1.1k 1/8W"
R11 R12: library part "RES 10k 1/8W - 1%", "RES SMD 10K OHM 1% 1/8W 0603", Manufacturer Part Number 1=ERJ-H3GJ103V, Manufacturer Part Number 2=RMCF0805JT10K0, Package=0805, Power (Watts)=0.125W, Supplier Part Number 1=10-ERJ-H3GJ103VCT-ND, Tolerance=5%, Part Number="RES 10k 1/8W - 1%", Supplier 1=Digi-Key, Supplier 2=Digi-Key, Supplier Part Number 2=RMCF0805JT10K0CT-ND, Supplier URL 1=https://www.digikey.ca/en/products/detail/panasonic-electronic-components/ERJ-H3GJ103V/13877876?s=N4IgTCBcDaIIwAYC0BRASgKSQCQMwHENFcA1AYQBUkA5AERAF0BfIA, Supplier URL 2=https://www.digikey.ca/en/products/detail/stackpole-electronics-inc/RMCF0805JT10K0/1757762?s=N4IgTCBcDaIEoFkDCAxADADjQVgFIBUBGNAaTSXxAF0BfIA, Tolerance 2=5%
R13 R15: library part "RES 1k 1/8W", "Default Resistor Symbol", Manufacturer Part Number 1=MCT06030C1001FP500, Package=0805, Power (Watts)=0.125W, Supplier Part Number 1=MCT0603-1.00K-CFCT-ND, Tolerance=1%, Part Number="RES 1k 1/8W", Supplier 1=Digi-Key, Supplier URL 1=https://www.digikey.ca/en/products/detail/vishay-beyschlag-draloric-bc-components/MCT06030C1001FP500/2607821?s=N4IgTCBcDaILIGEAqAGAbCgzAWgIwDoUUBpbBAMWWwDkAREAXQF8g
R17 R23: library part "RES 10k 1/8W - 5%", "RES SMD 10K OHM 5% 1/8W 0603", Package=0805, Power (Watts)=0.125W, Tolerance=5%, Part Number="RES 10k 1/8W - 5%"
R19 R24: "No Description Available", Mfr_Name=Yageo
R21 R22: library part "RES 4.7k 1/8W - 1%", "Default Resistor Symbol", Manufacturer Part Number 1=RMCF0603FT4K70, Package=0805, Power (Watts)=0.125W, Supplier Part Number 1=RMCF0603FT4K70CT-ND, Tolerance=1%, Part Number="RES 4.7k 1/8W - 1%", Supplier 1=Digi-Key, Supplier URL 1=https://www.digikey.ca/en/products/detail/stackpole-electronics-inc/RMCF0603FT4K70/1760998
R26 R27 R28 R29 R30 R31 R32 R33 R34 R35 R36 R37 R38: library part "RES 10k 1/8W - 1%", "Default Resistor Symbol", Manufacturer Part Number 1=ERJ-H3GJ103V, Manufacturer Part Number 2=RMCF0805JT10K0, Package=0805, Power (Watts)=0.125W, Supplier Part Number 1=10-ERJ-H3GJ103VCT-ND, Tolerance=5%, Part Number="RES 10k 1/8W - 1%", Supplier 1=Digi-Key, Supplier 2=Digi-Key, Supplier Part Number 2=RMCF0805JT10K0CT-ND, Supplier URL 1=https://www.digikey.ca/en/products/detail/panasonic-electronic-components/ERJ-H3GJ103V/13877876?s=N4IgTCBcDaIIwAYC0BRASgKSQCQMwHENFcA1AYQBUkA5AERAF0BfIA, Supplier URL 2=https://www.digikey.ca/en/products/detail/stackpole-electronics-inc/RMCF0805JT10K0/1757762?s=N4IgTCBcDaIEoFkDCAxADADjQVgFIBUBGNAaTSXxAF0BfIA, Tolerance 2=5%
S1: "Slide Switch SPDT Surface Mount, Right Angle", Manufacturer Part Number 1="JS102011SAQN SPDT", Package=None, Availability=Unavailable, MF=C&K, MP=JS102011SAQN, Part Number="SW SLIDE SMALL", Price=None, SnapEDA_Link=https://www.snapeda.com/parts/JS102011SAQN/C%26K/view-part/214325/?ref=snap, Supplier 1=Digi-key, Supplier Part Number 1="JS102011SAQN SPDT", Supplier URL 1=https://www.digikey.ca/en/products/detail/c-k/JS102011SAQN/1640095
S2 S3: "JLC Supplied: 50mA 3.9mm 100MΩ 100,000 Times 12V 250gf 2.9mm 2.5mm Round Button", Package=None, Availability=Unavailable, MP=EVP-AWCD4A, Price=None
SCL1 SDA1: library part "Test Point (Via)", Part Number="Test Point (Via)"
U1: library part XTPS62933DRLR, "No Description Available", Mfr_Name="Texas Instruments", RefDes=RefDes, Type=Type
U2: Package=None, Availability=Unavailable, MF="{'manufacturer': u'Texas Instruments'}", MP=NE555DR, Price=None
U3: "Stepper motor controler; IC: A4988; 1A; Uin mot: 8Ã·35V", Package=None, Availability=Unavailable, MP=A4988_STEPPER_MOTOR_DRIVER_CARRIER, Price=None
U4: "RX TXRX MOD WIFI SURFACE MOUNT", Package="SMD-48 Espressif Systems", Supplier Part Number 1=1904-1029-1-ND, Availability=Warning, Check_prices=https://www.snapeda.com/parts/ESP32-PICO-D4/Espressif%20Systems/view-part/2762121/?ref=eda, Manufacturer Part Number 1=ESP32-PICO-D4, MF="Espressif Systems", MP=ESP32-PICO-D4, Part Number=ESP32-PICO-D4, Price=None, Purchase-URL=https://pricing.snapeda.com/search/part/ESP32-PICO-D4/?ref=eda, SnapEDA_Link=https://www.snapeda.com/parts/ESP32-PICO-D4/Espressif%20Systems/view-part/2762121/?ref=snap, Supplier 1=Digi-key, Supplier URL 1=https://www.digikey.com/en/products/detail/espressif-systems/ESP32-PICO-D4/9381722
U5: "24-TSSOP -40 ~ 85", Package="TSSOP-24 Texas Instruments", Availability=Good, BuyPart=https://www.snapeda.com/parts/SN74LVC4245APWR/Texas%20Instruments/view-part/235354/?ref=eda, DigiKey-Purchase-URL=https://snapeda.com/shop?store=DigiKey&id=235354, MF="Texas Instruments", Mouser-Purchase-URL=https://snapeda.com/shop?store=Mouser&id=235354, MP=SN74LVC4245APWR, Price=None, SnapEDA_Link=https://www.snapeda.com/parts/SN74LVC4245APWR/Texas%20Instruments/view-part/235354/?ref=snap, Texas_Instruments-Purchase-URL=https://snapeda.com/shop?store=Texas+Instruments&id=235354
FL_RX1 FL_TX1: Part Number="Test Point (Via)"

## Free pads (board coordinates)
  round 60 hole 106.3 unplated: 1(137.8,3380) 1(2421.26,3380)

## Via types
v1: diameter 18, hole 8, SIG1 to SIG2, tented both sides, 328 vias
v2: diameter 19.68, hole 9.84, SIG1 to SIG2, tented both sides, 21 vias

## Nets (pads, with @x,y where several pads share a name; then routed paths per layer and width w, separated by ;. In a path a pad name is that pad's centre, name@x,y a point inside that pad or via, vN(x,y) a via of type N, cw(c..) or ccw(c..) an arc to the next point about the centre after c; other vN are vias at no path point)
1A1: J4.3 U3.12 | length 751.9
  SIG1 w30: J4.3 517.48,687.22 U3.12
1B1: J4.4 U3.11 | length 884.5
  SIG1 w30: J4.4 538.74,608.48 U3.11
2A1: J4.2 U3.13 | length 619.3
  SIG1 w30: J4.2 496.22,765.96 U3.13
2B1: J4.1 U3.14 | length 486.6
  SIG1 w30: J4.1 474.96,844.7 U3.14
3.3V: C25.2 J3.01 J3.17 J11.1 J12.1 U3.5 U3.6 U3.10 U5.23 U5.24 | length 788.5
  SIG1 w30: U5.23@1415,1977.01 1425,1977.01 ; U5.24 v1(1465,1977.01) C25.2
  PWR w30: U3.6 U3.5 860,829.74 U3.10
3V3: C16.2 C17.2 C18.2 C19.2 C20.2 C21.2 C22.2 C23.2 R17.2 R21.2 R22.2 R23.2 U4.1 U4.3 U4.4 U4.19 U4.26 U4.37 U4.43 U4.46 | length 900.1
  SIG1 w10: C21.2 1114.01,1605.47 1124.01,1595.47 1164.05,1595.47 U4.26 ; C20.2 1183.85,1356.96 1185.74,1358.85 U4.37 ; C22.2 1276.46,1701.52 1276.46,1683.02 1282.28,1677.2 1282.28,1635.9 U4.19 ; U4.43 1303.85,1321.15 1315,1310 C19.2 ; U4.46 1362.91,1336.57 1374.01,1325.47 1404.01,1325.47 1414.01,1315.47 C18.2 ; U4.1 1424.28,1395.47 1464.01,1395.47 1474.01,1385.47 C17.2 ; U4.3 1482.91,1436.57 1501.56,1417.91 1520.06,1417.91 C23.2 ; U4.4 1423.34,1455.47 1484.01,1455.47 1494.01,1465.47 C16.2 ; R23.2 v1(1955,1565) ; R17.2 v1(1955,1890)
  SIG2 w10: R21.2 v1(443,953) ; v1(683.13,811.87) 683.13,878.88 R22.2
5V: C5.2 C6.2 C7.2 C8.2 C9.2 C26.2 D5.A L1.2 R6.2 | length 702.2
  SIG1 w7: 1030,2470 1065,2435 1490,2435 1570,2515 1570,2590.9 1574.1,2595 R6.2
5V_FLASH: D4.A J13.01 | length 99
  SIG1 w30: D4.A J13.01@616,1244
5V_PI: C24.2 D4.C D5.C J3.02 J3.04 J5.1 R9.2 R14.2 R16.2 R18.2 R20.2 R26.1 U2.4 U2.8 U5.1 | length 5971.1
  SIG1 w30: R9.2 234.22,345.78 260.42,319.58 324.95,319.58 J3.02 ; U5.1@1440,2205 1527,2205 R26.1 v1(1530,2255) C24.2 ; U2.4 v1(1950,2075) ; v1(1975,2225) U2.8
  PWR w90: J3.04 J3.02 258.58,315 200,256.42 200,137.72 252.72,85 2336.61,85 2389.33,137.72 2389.33,450.41 J5.1 2262.72,529.74 2210,582.46 2210,1997.28 2157.28,2050 2015,2050 1965,2100 1965,2215 1925,2255 v1(1530,2255)
  other v1: 332,1124 368,1124 404,1124 440,1124 332,1160 368,1160 404,1160 440,1160 332,1196 368,1196 404,1196 440,1196 476,1196 512,1196 368,1232 404,1232 440,1232 476,1232 512,1232
+VBAT: F1.1 J1.1 J2.1 J6.1 J7.1 J8.1 J9.1 P1.2 U3.16
A_END: J3.15 J12.2 R12.2 | length 130.1
  SIG1 w7: J12.2 298.63,2977 R12.2
BOOT: C14.2 R17.1 S2.2 U4.23 | length 1041.8
  SIG1 w7: v1(1139.87,1725.59) 1141.98,1723.49 1155.99,1723.49 1205.42,1674.05 U4.23 ; v1(1600,1800) 1719.69,1800 ; C14.2 1720,1799.69 1719.69,1800 ; R17.1 S2.2 1839.37,1800 1719.69,1800
  SIG2 w7: v1(1139.87,1725.59) 1525.59,1725.59 v1(1600,1800)
D_LED1: J3.19 Q3.1
D_LED2: J3.10 Q4.1
D_LED3: J3.24 Q5.1
D_LED4: J3.38 Q6.1
DIR1: J1.2 J3.07 J6.2 J8.2
DIR2: J2.2 J3.11 J7.2 J9.2
EN: C13.2 C15.2 R23.1 S3.2 U4.9 | length 807.7
  SIG1 w7: U4.9 v1(1479.68,1554.68) ; C13.2 1720,1460 1735.63,1475.63 S3.2 ; v1(1840,1525) S3.2 ; C15.2 R23.1 S3.2
  SIG2 w7: v1(1479.68,1554.68) 1509.36,1525 v1(1840,1525)
F_END: J3.13 J11.2 R11.2 | length 111.8
  SIG1 w7: J11.2 355.74,2731.26 R11.2
FB: R6.1 R7.2 U1.8 | length 171.2
  SIG1 w25: R6.1 R7.2 1535,2687 1535,2730 1539.53,2734.53 U1.8
FG1: J1.3 R27.1 U5.3 | length 1976.4
  SIG1 w7: v1(1380,2130) 1383.15,2133.15 U5.3 ; R27.1 2175,1223.61 2198.2,1246.8 J1.3
  SIG2 w7: v1(1380,2130) 1465,2045 2150,2045 2220,1975 2220,1275 2248.2,1246.8 J1.3
FG2: J6.3 R29.1 U5.4 | length 1613.2
  SIG1 w7: U5.4 1357.56,2247.56 v1(1375,2265) ; R29.1 2175,1787.77 2193.62,1806.38 J6.3
  SIG2 w7: v1(1375,2265) 2200,2265 2255,2210 2255,1825 2273.62,1806.38 J6.3
FG3: J8.3 R31.1 U5.5 | length 1304.5
  SIG1 w7: U5.5 v1(1331.97,2311.97) ; R31.1 2175,2407.68 2216.72,2365.96 J8.3
  SIG2 w7: v1(1331.97,2311.97) 1333.54,2311.97 1341.57,2320 2264.04,2320 J8.3
FG4: J2.3 R28.1 U5.6 | length 2140.3
  SIG1 w7: J2.3 318.17,1246.8 360,1288.63 R28.1 ; v1(1280,2120) 1305,2145 1305,2201.61 U5.6
  SIG2 w7: J2.3 346.8,1246.8 360,1260 360,2085 395,2120 v1(1280,2120)
FG5: J7.3 R30.1 U5.7 | length 1561.4
  SIG1 w7: J7.3 351.19,1806.38 360,1815.19 R30.1 ; v1(1270,2145) 1280,2155 1280,2202.2 U5.7
  SIG2 w7: J7.3 321.38,1806.38 335,1820 335,2115 365,2145 v1(1270,2145)
FG6: J9.3 R32.1 U5.8 | length 1291.5
  SIG1 w7: J9.3 255.96,2360 350,2360 360.9,2370.9 360.9,2402.1 R32.1 ; U5.8 v1(1255.2,2319.8)
  SIG2 w7: J9.3 285.96,2330 1245,2330 v1(1255.2,2319.8)
FLASH_RX: FL_RX1.1 R13.2 U4.40 | length 705.1
  SIG1 w7: R13.2 905,1340 990,1255 990,1220 1015,1195 1055,1195 FL_RX1.1 1060,1195 1200,1195 1244.8,1239.8 U4.40
FLASH_TX: FL_TX1.1 R15.2 U4.41 | length 580.6
  SIG1 w7: R15.2 FL_TX1.1 1200,1145 1264.48,1209.48 U4.41
GND: C12.1 C13.1 C14.1 C15.1 C16.1 C17.1 C18.1 C19.1 C20.1 C21.1 C22.1 C23.1 C24.1 C25.1 D2.C GND1.1 J3.06 J3.09 J3.14 J3.20 J3.25 J3.34 J3.39 J5.3 J13.04 Q3.2 Q4.2 Q5.2 Q6.2 R3.2 R11.1 R12.1 R26.2 R27.2 R28.2 R29.2 R30.2 R31.2 R32.2 R33.2 R34.2 R35.2 R36.2 R37.2 R38.2 S2.1 S3.1 U2.1 U3.9 U3.15 U4.49 U5.2 U5.9 U5.10 U5.11 U5.12 U5.13 U5.22 | length 48.9
  SIG1 w7: S2.1@1839.37,1630 S2.1
  SIG1 w25: R3.2 1903,2358
  other v1: 1225,1805 1260,1805 1295,1805 1330,1805
  other v2: 1242.33,1413.96 1294.01,1413.96 1347.45,1413.96 1204.37,1451.93 1242.33,1451.93 1294.01,1451.93 1347.45,1451.93 1385.07,1451.93 1204.37,1505.47 1242.33,1505.47 1294.01,1505.47 1347.45,1505.47 1385.07,1505.47 1204.37,1556.35 1242.33,1556.35 1294.01,1556.35 1347.45,1556.35 1385.07,1556.35 1242.33,1596.78 1294.01,1596.78 1347.45,1596.78
I2C_SCL: J3.05 R22.1 SCL1.1 U4.39 | length 1990.2
  SIG1 w5: v1(1200,1290) 1225.11,1315.11 U4.39
  SIG2 w5: J3.05 529.53,219.53 580,270 580,455 610,485 610,925 655,970 1270,970 SCL1.1 1350,1235 1295,1290 v1(1200,1290)
I2C_SDA: J3.03 R21.1 SDA1.1 U4.42 | length 2122.8
  SIG1 w5: v1(1284.17,1148.11) U4.42
  SIG2 w5: J3.03 490,275.47 490,355 515,380 515,424.26 515,462.95 515,607.74 515,635.24 cw(c527.5,635.24) 527.5,647.74 529,647.74 ccw(c529,660.24) 529,672.74 504.86,672.74 cw(c504.86,685.24) 504.86,697.74 529,697.74 ccw(c529,710.24) 529,722.74 504.86,722.74 cw(c504.86,735.24) 504.86,747.74 529,747.74 ccw(c529,760.24) 529,772.74 527.5,772.74 cw(c527.5,785.24) 515,785.24 515,802.13 515,885 515,1070 545,1100 SDA1.1 1284.17,1119.17 v1(1284.17,1148.11)
I_PWM1: J1.4 R19.1 R24.1 R33.1 | length 138.1
  SIG1 w7: R33.1 2182.54,1325.54 J1.4
I_PWM2: J6.4 R19.3 R24.2 R35.1 | length 144.2
  SIG1 w7: R35.1 2280.86,1863 2302.99,1885.12 J6.4
I_PWM3: J8.4 R19.4 R24.3 R37.1 | length 269.1
  SIG1 w7: R37.1 2178,2610 2225,2610 2250,2585 2250,2475 2273.75,2451.25 2303.46,2451.25 J8.4
I_PWM4: J2.4 R19.5 R24.4 R34.1 | length 341.5
  SIG1 w7: J2.4 241.49,1159.55 214.55,1159.55 180,1125 180,1065 213,1032 R34.1
I_PWM5: J7.4 R19.7 R24.5 R36.1 | length 110.3
  SIG1 w7: J7.4 359.36,1727.64 R36.1
I_PWM6: J9.4 R19.8 R24.6 R38.1 | length 112.2
  SIG1 w7: J9.4 354.78,2287.22 R38.1
J_PWM_L: R19.2 R24.14 R24.15 R24.16
J_PWM_R: R19.6 R24.11 R24.12 R24.13
MD_OUT: R25.1 U2.3 U4.6 | length 1021.1
  SIG1 w7: U4.6 1484.17,1495.62 1493.35,1504.81 1583.35,1504.81 1604.01,1525.47 1700.47,1525.47 v1(1735,1560) ; v1(1737,2017) R25.1 1780,2100 1805,2125 U2.3
  SIG2 w7: v1(1735,1560) 1735,2015 v1(1737,2017)
Net1_1: 1.1 U4.5 | length 214.5
  SIG1 w7: U4.5 1424.08,1477.47 1486.01,1477.47 1500.12,1491.58 1607.66,1491.58 1611.76,1495.68 1611.76,1497.15 1620.07,1505.47 1.1
Net2_1: 2.1 U4.8 | length 135.8
  SIG1 w7: U4.8 1513.54,1534.99 1524.01,1545.47 2.1
Net3_1: 3.1 U4.10 | length 201.9
  SIG1 w7: U4.10 1522.91,1574.36 1524.01,1575.47 3.1
Net4_1: 4.1 U4.32 | length 182.5
  SIG1 w7: 4.1 1024.01,1421.37 1028.11,1425.47 1044.01,1425.47 1094.48,1475.94 U4.32
Net5_1: 5.1 U4.11 | length 166.5
  SIG1 w7: U4.11 1512.59,1594.05 1530.67,1612.13 5.1@1581.57,1612.13
Net6_1: 6.1 U4.33 | length 240.8
  SIG1 w7: 6.1 1034.01,1365.47 1054.01,1385.47 1054.01,1405.47 1104.8,1456.25 U4.33
Net7_1: 7.1 U4.22 | length 166.4
  SIG1 w7: 7.1 1148.99,1757.15 1148.99,1750.49 1224.01,1675.47 1224.01,1635.11 U4.22
Net8_1: 8.1 U4.31 | length 214.3
  SIG1 w7: 8.1 1039.01,1440.47 1094.17,1495.62 U4.31
Net9_1: 9.1 U4.30 | length 156.9
  SIG1 w7: 9.1 1056.51,1477.97 1093.85,1515.31 U4.30
Net10_1: 10.1 U4.2 | length 184.3
  SIG1 w7: U4.2 1462.59,1416.88 1514.01,1365.47 10.1
Net11_1: 11.1 U4.18 | length 143.9
  SIG1 w7: U4.18 1304.01,1634.17 1304.01,1715.47 1334.01,1745.47 11.1
Net12_1: 12.1 U4.28 | length 203.6
  SIG1 w7: 12.1 1044.01,1525.47 1073.22,1554.68 U4.28
Net13_1: 13.1 U4.25 | length 105.3
  SIG1 w7: 13.1 1144.01,1655.47 1154.01,1645.47 1154.01,1617.12 1157.4,1613.73 U4.25
Net14_1: 14.1 U4.27 | length 149.3
  SIG1 w7: 14.1 1026.16,1557.61 1046.16,1557.61 1062.91,1574.36 U4.27
Net15_1: 15.1 U4.34 | length 221.3
  SIG1 w7: 15.1 1056.51,1327.97 1064.51,1335.97 1064.51,1395.47 1105.61,1436.57 U4.34
Net16_1: 16.1 U4.45 | length 213.4
  SIG1 w7: U4.45 1343.22,1331.78 1375,1300 1375,1227.78 1393.69,1209.09 1393.69,1186.31 16.1
Net17_1: 17.1 U4.44 | length 259.1
  SIG1 w7: U4.44 1324.01,1376.45 1324.01,1325.99 1360,1290 1360,1195 1365,1190 17.1
Net18_1: 18.1 U4.20 | length 144.1
  SIG1 w7: 18.1 1234.01,1705.47 1264.48,1674.99 U4.20
Net19_1: 19.1 U4.17 | length 192.4
  SIG1 w7: U4.17 1324.01,1634.48 1324.01,1705.47 1374.01,1755.47 19.1
Net20_1: 20.1 U4.21 | length 195.3
  SIG1 w7: 20.1 1187.34,1732.13 1244.8,1674.68 U4.21
Net21_1: 21.1 U4.16 | length 168.9
  SIG1 w7: U4.16 1344.01,1634.8 1344.01,1705.47 1391.76,1753.22 1405.7,1753.22 1414.01,1761.53 21.1
Net22_1: 22.1 U4.12 | length 214.6
  SIG1 w7: U4.12 1502.28,1613.73 1534.01,1645.47 22.1
Net23_1: 23.1 U4.13 | length 205.3
  SIG1 w7: U4.13 1402.28,1642.08 1405.67,1645.47 1494.01,1645.47 1534.01,1685.47 23.1
Net24_1: 24.1 U4.14 | length 301.2
  SIG1 w7: U4.14 1382.59,1671.37 1386.69,1675.47 1494.01,1675.47 1544.01,1725.47 24.1
NetC1_1: C1.1 L1.1 U1.5 | length 93.1
  SIG1 w7: L1.1 1247.6,2625 L1.1@1313,2559.6
NetC1_2: C1.2 R5.1 | length 94.2
  SIG1 w7: C1.2 1390,2498 R5.1
NetC11_1: C11.1 C12.2 R8.2 U2.2 U2.6 | length 540
  SIG1 w7: R8.2 1743,2175 U2.2 1935,2175 1985,2125 U2.6 C12.2 C11.1
NetD1_1: D1.1 Q1.3 Q2.3 R2.2 | length 258.2
  SIG1 w7: 1770,3340 1830,3340 1850,3320 D1.1 1852.38,3270 1910,3270 1930,3250 R2.2
  other v1: 1591,3310 1627,3310 1663,3310 1699,3310 1735,3310 1772,3320 1772,3356 1772,3392 1591,3400 1627,3400 1663,3400 1699,3400 1735,3400 1772,3428 1772,3464 1592,3495 1628,3495 1664,3495 1700,3495 1736,3495 1772,3495
NetD1_2: D1.2 Q1.1 Q2.1 R1.2 | length 768.4
  SIG1 w10: Q1.1 v1(1665,3220) 1665,3197.5 1682.5,3180 R1.2 1990,3180 2000,3190 2000,3290 1892.8,3397.2 1876.09,3397.2 1850,3423.28 D1.2
  SIG2 w10: Q2.1 v1(1665,3220)
NetD2_A: D2.A R9.1 | length 81.8
  SIG1 w30: D2.A 175.52,190.95 175.52,271.26 R9.1
NetD3_A: D3.A R10.1 | length 107.6
  SIG1 w7: R10.1 D3.A
NetD6_A: D6.A R14.1
NetD6_C: D6.C Q3.3
NetD7_A: D7.A R16.1
NetD7_C: D7.C Q4.3
NetD8_A: D8.A R18.1
NetD8_C: D8.C Q5.3
NetD9_A: D9.A R20.1
NetD9_C: D9.C Q6.3
NetF1_2: F1.2 Q1.2
NetJ13_02: J13.02 R13.1 | length 95
  SIG1 w7: J13.02 R13.1
NetJ13_03: J13.03 R15.1 | length 100
  SIG1 w7: R15.1 J13.03
NetR1_1: R1.1 R2.1 S1.2 | length 268
  SIG1 w7: R1.1 R2.1 2120,3250 2140,3270 S1.2
NetR4_1: R4.1 U1.1 | length 79.8
  SIG1 w25: U1.1@1541.85,2828 1565.66,2851.81 1600.5,2851.81 1608,2859.31 R4.1
NetR5_2: R5.2 U1.6 | length 185.2
  SIG1 w7: R5.2 1390,2700 1405,2715 1470,2715 1500,2745 1500,2763.34 U1.6
PGND: C2.1 C3.1 C4.1 C5.1 C6.1 C7.1 C8.1 C9.1 C10.1 C26.1 D3.C J1.5 J2.5 J6.5 J7.5 J8.5 J9.5 P1.1 PGND1.1 R3.1 R4.2 R7.1 S1.3 U1.4 | length 185.5
  SIG1 w7: D3.C v1(2440,3100)
  SIG1 w25: R3.1 v1(1903,2432) ; v1(1980,3360) 2038.31,3360 S1.3
  other v1: 1450,2498 1486,2498 1450,2524 1486,2524 1450,2550 1486,2550 1664,2682 1700,2682 1664,2718 1700,2718 1592,2744 1628,2744 1664,2744 1700,2744 1592,2780 1628,2780 1664,2780 1700,2780 1124,2816 1160,2816 1196,2816 1232,2816 1268,2816 1304,2816 1340,2816 1376,2816 1412,2816 1448,2816 1664,2816 1700,2816 1088,2852 1124,2852 1304,2852 1340,2852 1376,2852 1412,2852 1448,2852 1088,2888 1124,2888 1304,2888 1340,2888 1376,2888 1412,2888 1052,2924 1088,2924 1124,2924 1304,2924 1340,2924 1376,2924 1412,2924 512,2960 1052,2960 1088,2960 1124,2960 1304,2960 1340,2960 1376,2960 1412,2960 1448,2960 476,2996 512,2996 548,2996 584,2996 620,2996 656,2996 692,2996 728,2996 764,2996 800,2996 836,2996 872,2996 908,2996 944,2996 980,2996 1016,2996 1052,2996 1088,2996 1124,2996 1304,2996 1340,2996 1376,2996 1412,2996 440,3032 476,3032 512,3032 548,3032 584,3032 620,3032 656,3032 692,3032 728,3032 764,3032 800,3032 836,3032 872,3032 908,3032 944,3032 980,3032 1016,3032 1052,3032 1088,3032 1124,3032 1160,3032 1196,3032 1232,3032 1268,3032 1304,3032 1340,3032 1376,3032 1412,3032 404,3068 440,3068 476,3068 512,3068 548,3068 584,3068 620,3068 656,3068 1052,3068 1088,3068 1124,3068 1160,3068 1196,3068 1232,3068 1268,3068 1304,3068 1340,3068 1376,3068 1412,3068 404,3104 440,3104 476,3104 656,3104 1088,3104 1124,3104 1160,3104 1196,3104 1232,3104 1268,3104 1304,3104 1340,3104 1376,3104 1412,3104 404,3140 440,3140 656,3140 1124,3140 1160,3140 1196,3140 1232,3140 1268,3140 1304,3140 1340,3140 1376,3140 1412,3140 1448,3140 404,3176 440,3176 656,3176 1160,3176 1196,3176 1232,3176 1268,3176 1304,3176 1340,3176 1376,3176 1412,3176 1448,3176 404,3212 440,3212 656,3212 404,3248 440,3248 476,3248 620,3248 656,3248 404,3284 440,3284 476,3284 512,3284 548,3284 584,3284 620,3284 656,3284 404,3320 440,3320 476,3320 512,3320 548,3320 584,3320 620,3320 656,3320 512,3356 548,3356 584,3356 620,3356 656,3356 512,3392 548,3392 584,3392 620,3392 656,3392 512,3428 548,3428 584,3428 620,3428 656,3428 476,3464 512,3464 548,3464 584,3464 620,3464 656,3464
PWM1: J3.16 R19.15 R19.16
PWM2: J3.18 R19.14
PWM3: J3.22 R19.13
PWM4: J3.32 R19.11 R19.12
PWM5: J3.36 R19.10
PWM6: J3.37 R19.9
SCOIL_1: J10.1 R8.1 R25.2 | length 1259.6
  SIG1 w7: R25.2 1663,2175.9 1662.9,2176 1662.9,2227.9 1687,2252 R8.1 v1(1740,2350)
  SIG2 w7: v1(1740,2350) 1740,2695 1816.26,2771.26 J10.1
SCOIL_2: C11.2 J10.2 | length 759.8
  SIG1 w7: C11.2 v1(2175,2350)
  SIG2 w7: v1(2175,2350) 2175,2625 2250,2700 2350,2700 2375,2725 2375,2825 2350,2850 J10.2
SPWM: J3.33 J5.2
SS: C10.2 U1.7 | length 122.1
  SIG1 w7: C10.2 1470,2692.58 1519.84,2742.42 U1.7
ST_DIR: J3.31 U3.8
STEP: J3.29 U3.7
T_FG1: U4.15 U5.21 | length 429.2
  SIG1 w7: U5.21 1357.56,1877.44 1442.1,1792.9 1442.1,1732.1 1425.47,1715.47 1394.01,1715.47 1362.91,1684.36 U4.15
T_FG2: U4.29 U5.20 | length 1007.4
  SIG1 w7: v1(954.01,1495.47) 984.01,1495.47 989.01,1500.47 1049.01,1500.47 1083.54,1534.99 U4.29 ; v1(1150,1830) 1315,1830 1331.97,1846.97 U5.20
  SIG2 w7: v1(954.01,1495.47) 990.47,1495.47 1085,1590 1085,1805 1110,1830 v1(1150,1830)
T_FG3: U4.24 U5.19 | length 572.5
  SIG1 w7: v1(1105,1715.47) 1125.25,1715.47 1132.63,1708.09 1151.38,1708.09 1185.74,1673.73 U4.24 ; v1(1195,1847.5) 1287.5,1847.5 1306.38,1866.38 U5.19
  SIG2 w7: v1(1105,1715.47) 1105,1790 1125,1810 1185.76,1810 1195,1819.24 v1(1195,1847.5)
T_FG4: U4.35 U5.18 | length 1292.9
  SIG1 w7: v1(1044.01,1295.47) 1054.01,1295.47 1084.01,1325.47 1084.01,1394.47 1106.42,1416.88 U4.35 ; v1(1236.05,1868.95) 1268.38,1868.95 1280.79,1881.36 U5.18
  SIG2 w7: v1(1044.01,1295.47) 1044.01,1400.99 975,1470 940,1470 910,1500 910,1800 978.95,1868.95 v1(1236.05,1868.95)
T_FG5: U4.36 U5.17 | length 1335.5
  SIG1 w7: v1(1072.61,1284.06) 1104.01,1315.47 1104.01,1385.47 1115.74,1397.2 U4.36 ; v1(1255.2,1900.2) U5.17
  SIG2 w7: v1(1072.61,1284.06) 1072.61,1282.61 1060,1270 1019.1,1270 1015,1274.1 1015,1395 970,1440 935,1440 885,1490 885,1800 985.2,1900.2 v1(1255.2,1900.2)
T_FG6: U4.7 U5.16 | length 1048.9
  SIG1 w7: v1(1229.61,1925.39) U5.16 ; U4.7 1446.17,1515.31 1451.33,1520.47 1579.01,1520.47 1604.01,1545.47 v1(1654.01,1545.47)
  SIG2 w7: 1239.75,1925 1585,1925 1654.01,1855.99 v1(1654.01,1545.47)
VBAT: C2.2 C3.2 C4.2 Q2.2 R10.2 U1.3
  other v1: 1805,3012 1841,3012 1877,3012 1913,3012 1949,3012 1985,3012 2021,3012 2057,3012 1805,3048 1841,3048 1877,3048 1913,3048 1949,3048 1985,3048 2021,3048 2057,3048 1805,3084 1841,3084 1877,3084 1913,3084 1949,3084 1985,3084 2021,3084 2057,3084 1805,3120 1841,3120 1877,3120 1913,3120 1949,3120 1985,3120 2021,3120 2057,3120
pads on no net: J3.08 J3.12 J3.21 J3.23 J3.26 J3.27 J3.28 J3.30 J3.35 J3.40 J4.5 J5.4 J5.5 P1.Un1 P1.Un2 R24.7 R24.8 R24.9 R24.10 S1. S1.1 U1.2 U2.5 U2.7 U3.1 U3.2 U3.3 U3.4 U4.38 U4.47 U4.48 U5.14 U5.15
copper on no net:
  other v1: 1225,1805

## Polygon pours and split planes (outlines as drawn)
VBAT on SIG2 "NONET_L-01_P-001" (solid, pour order 20): 1790,3415 2080,3415 2080,2995 1790,2995
NetD1_1 on SIG2 "NONET_L-01_P-001" (solid, remove dead copper, pour order 19): 1570,3295 1570,3515 1790,3515 1790,3295
GND on SIG1 "NONET_L-01_P-001" (solid, pour order 32): 0,3545 2559.06,3545 2559.05,0 0,0
5V on SIG1 "NONET_L-01_P-001" (solid, pour order 23): 530,2900 1050,2900 1050,2450 530,2450
PGND on SIG1 "NONET_L-01_P-001" (solid, pour order 24): 370,3510 370,3055 525,2900 1050,2900 1050,2865 1135,2780 1487.78,2780 1485,2782.78 1485,3510
VBAT on SIG1 "NONET_L-01_P-001" (solid, remove dead copper, pour order 22): 2150,2995 2150,3135 1485,3135 1485,2815 1575,2815 1575,2905 1665,2995
5V_PI on SIG1 "NONET_L-01_P-001" (solid, pour order 28): 425,1270 290,1270 290,1100 550.74,1100 550.74,2375.74 550.74,2575 425,2575
PGND on SIG1 "NONET_L-01_P-001" (solid, pour order 27): 1430,2620 1510,2620 1510,2490 1490,2470 1430,2470